# Altium PCB PCB.PcbDoc (part 1 of 2)
Units mm, origin at the board's own origin, x right, y up, seen from the top; angles counter-clockwise.
Board outline 86.23 x 63.63 mm, 4 copper layers (Top Layer, GND top, GND bottom, Bottom Layer), stack 0.603 mm thick; 101 components, 79 nets, 364 pads, 164 vias.
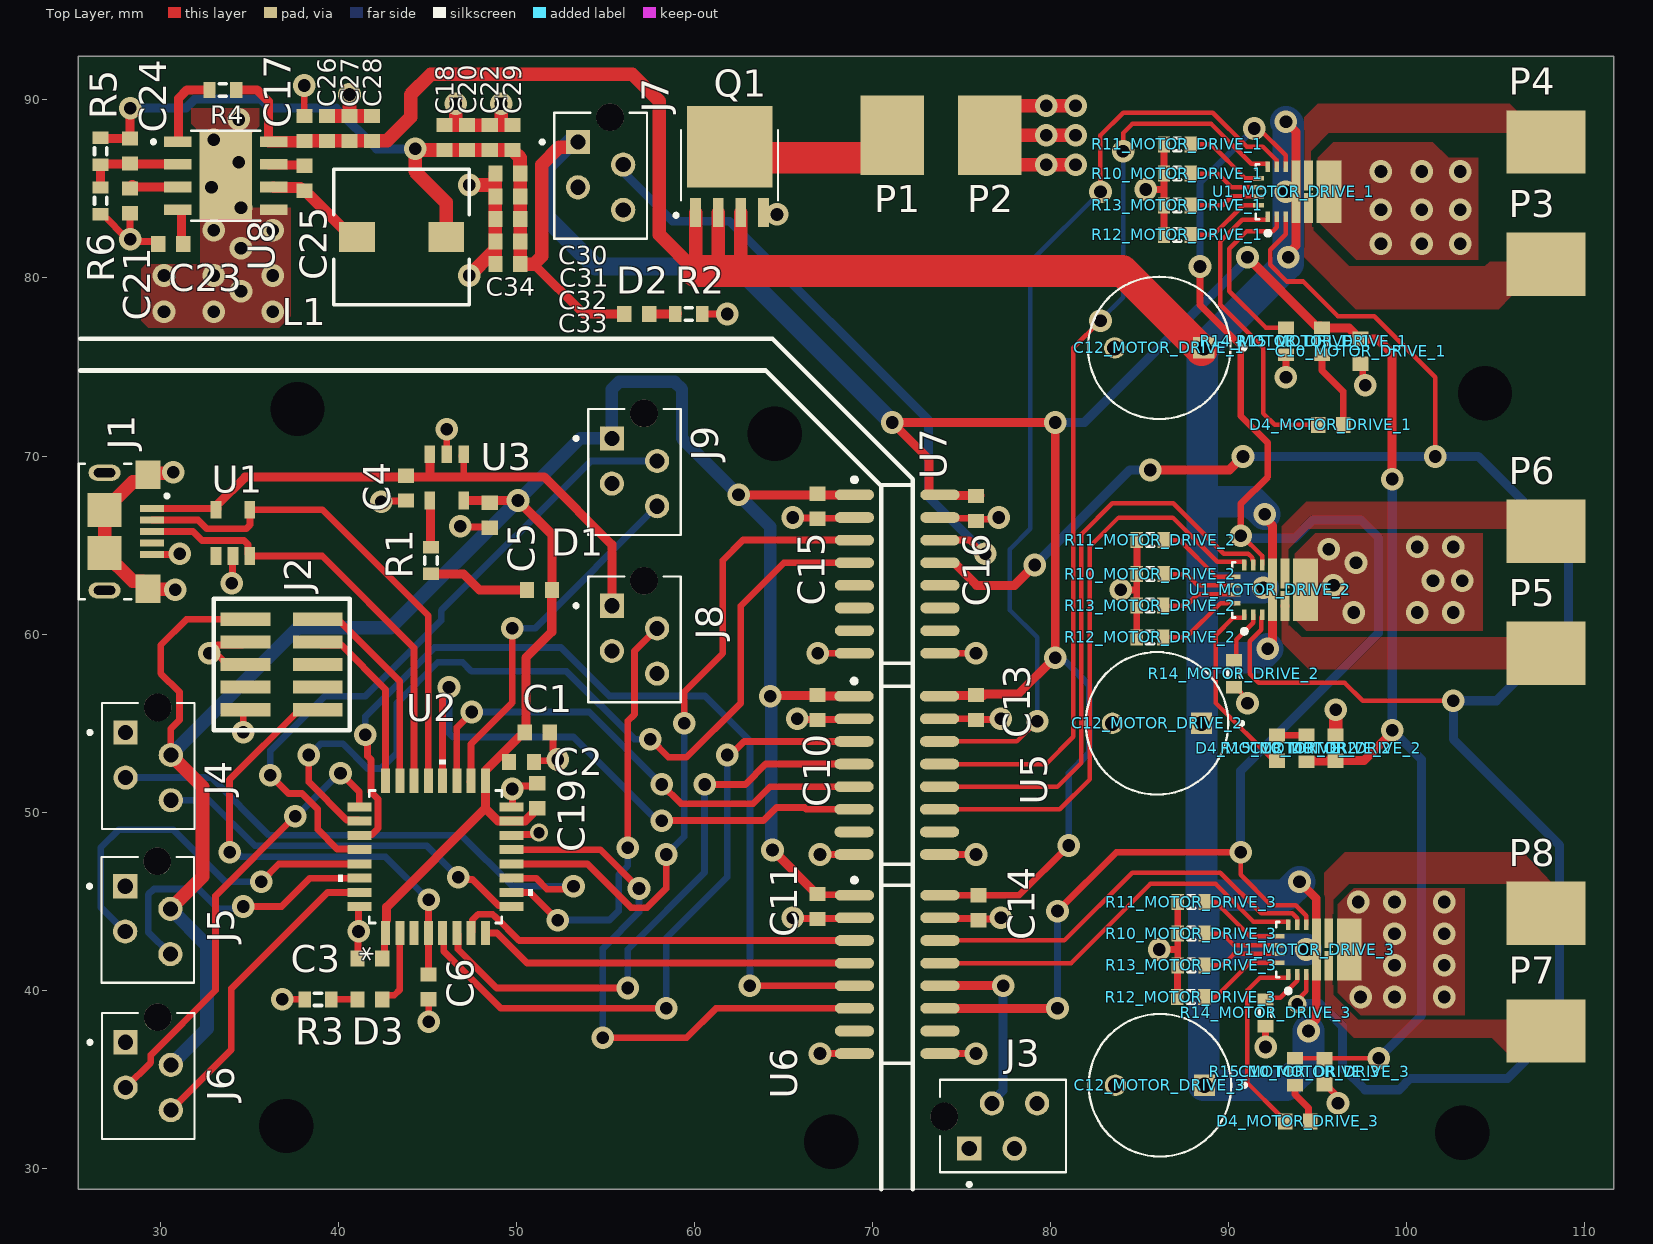
[diagram p0: Top Layer view]
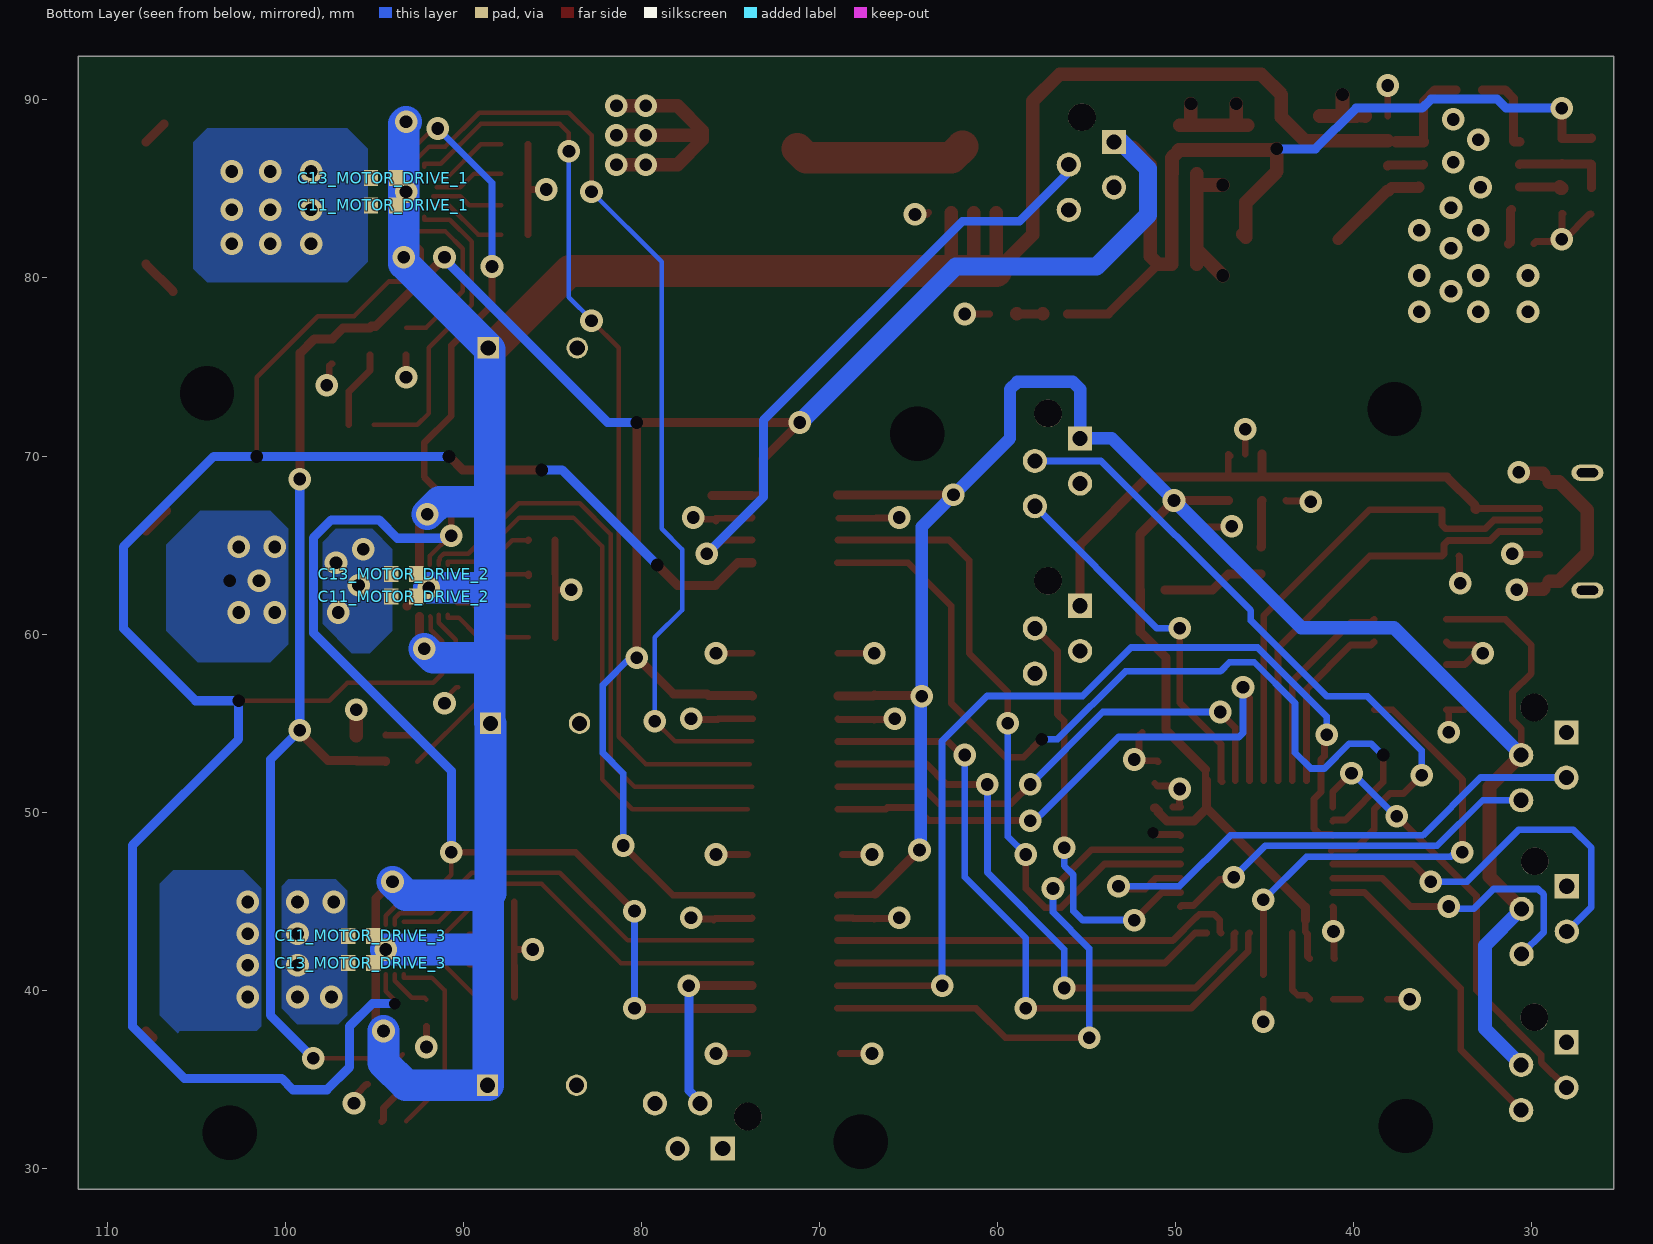
[diagram p1: Bottom Layer view, seen from below]
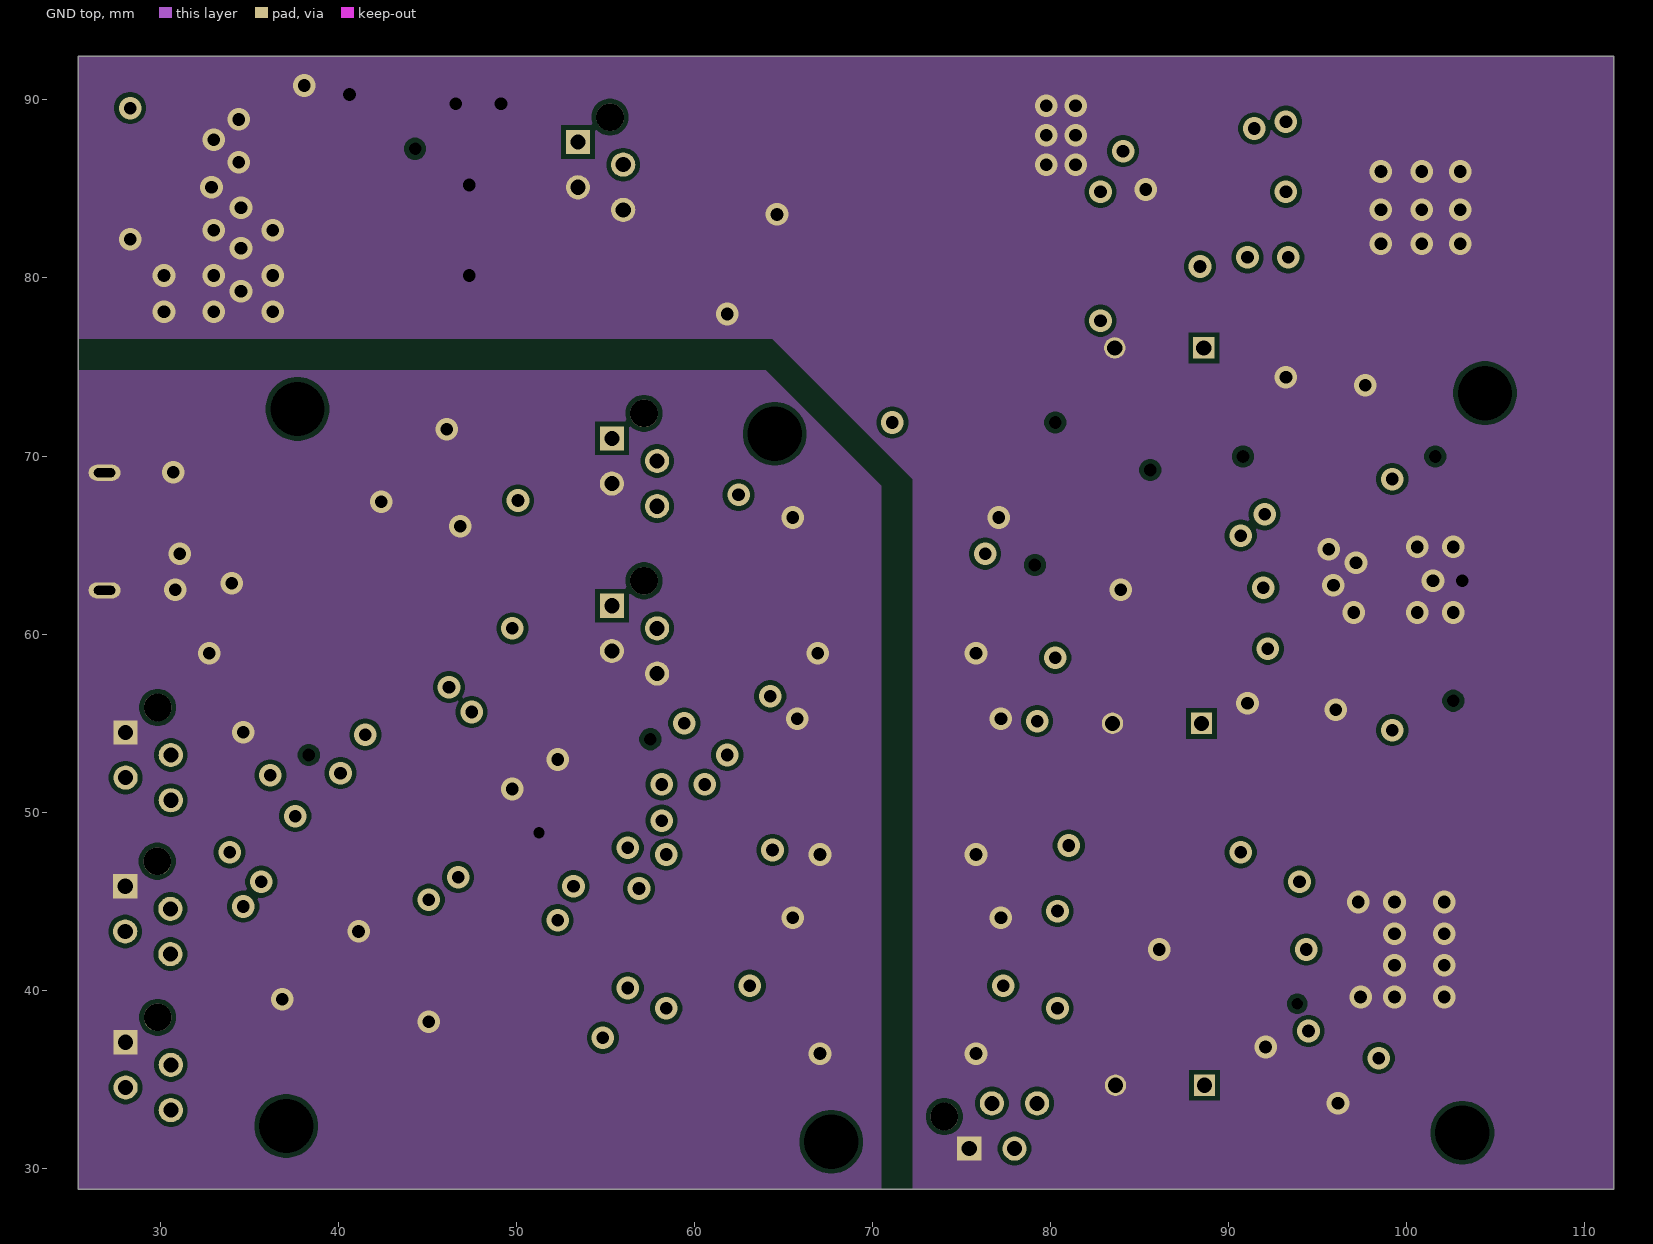
[diagram p2: GND top]
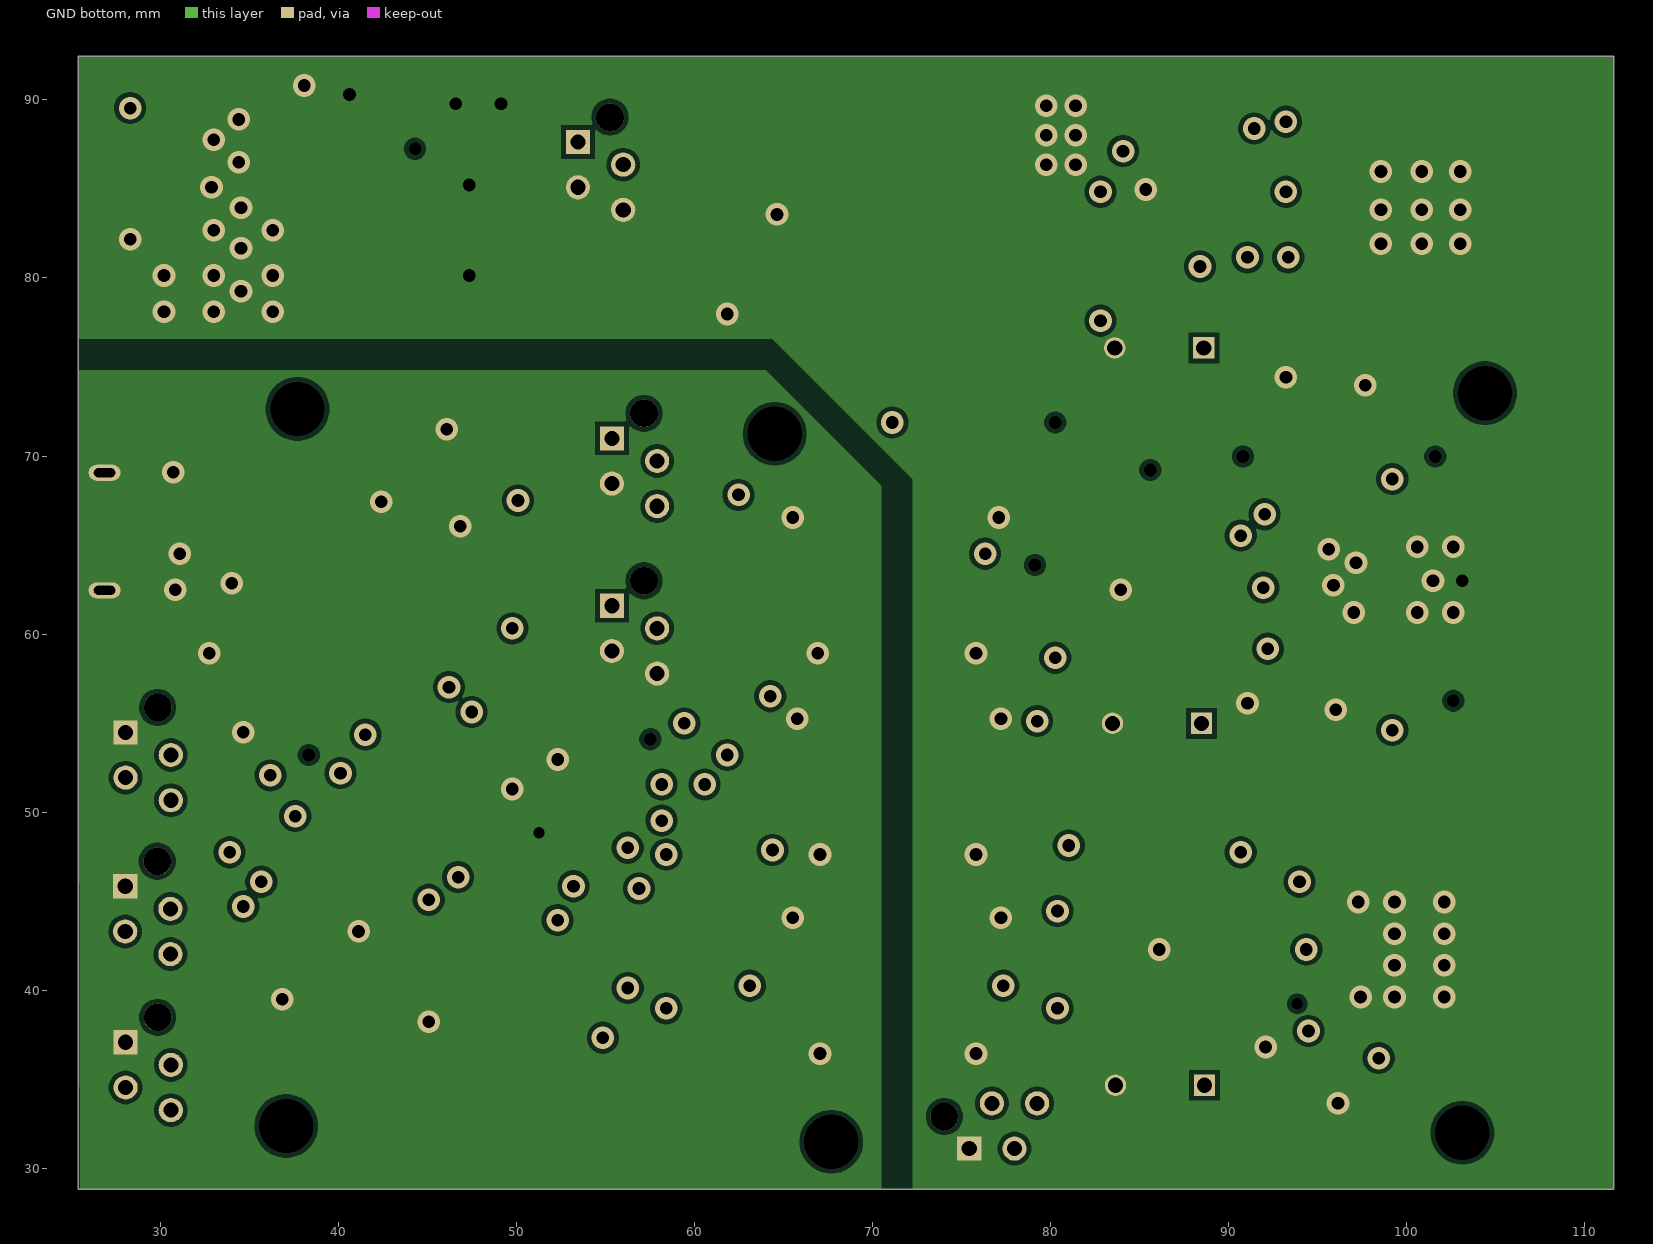
[diagram p3: GND bottom]

## Layer stack, top to bottom
Top Solder: solder mask 0.0102, Solder Resist, Dk 3.5
Top Layer: signal copper 0.035
Dielectric 2: prepreg 0.0711, PP-006, Dk 4.1
GND top: signal copper 0.0356
Dielectric 1: dielectric 0.32, FR-4, Dk 4.8
GND bottom: signal copper 0.0356
Dielectric 3: prepreg 0.0711, PP-006, Dk 4.1
Bottom Layer: signal copper 0.035
Bottom Solder: solder mask 0.0102, Solder Resist, Dk 3.5

## Board outline
25.4,28.829 25.4,92.456 111.633,92.456 111.633,28.829

## Design rules (kind name [scope] priority, off if disabled: settings)
Clearance [All] p1: gap=0.254 ignorepadtopadclearanceinfootprint=TRUE except(0: Arc-Hole Track-Hole SMDPad-Hole THPad-Hole Via-Hole Fill-Hole Poly-Hole Region-Hole Text-Hole; 0.178: Arc-SMDPad Track-SMDPad; 0.203: Arc-Arc Arc-Track Track-Track)
HoleSize [All] p1: absolutevalues=TRUE maxlimit=6.3 minlimit=0.2 maxpercent=80.000 minpercent=20.000
PolygonConnect [All] p1: connectstyle=Direct reliefconductorwidth=0.254 reliefentries=4 polygonreliefangle="90 Angle" airgapwidth=0.254
RoutingVias [All] p1: holewidth=0.711 width=1.27 viastyle="Through Hole" minholewidth=0.711 minwidth=1.27 maxholewidth=0.711 maxwidth=1.27
SolderMaskExpansion SolderMaskExpansionVia [IsVia] p1: expansion=0.102 istentingtop=TRUE
SolderMaskExpansion [All] p2: expansion=0.102 istentingtop=FALSE
Width [All] p1: maxlimit=1.778 minlimit=0.254 preferedwidth=0.381 midlayer1_maxwidth=0.254 midlayer1_prefwidth=0.254 midlayer2_maxwidth=0.254 midlayer2_prefwidth=0.254 minimp=50.000000 maximp=50.000000 favimp=50.000000
29 further rules are at their usual default settings.

## Classes and differential pairs
channel class motor_DRV: MOTOR_DRIVE_1 MOTOR_DRIVE_2 MOTOR_DRIVE_3
component class motor_MCU: C1 C2 C3 C4 C5 C6 C10 C11 C13 C14 C15 C16 C17 C18 C19 C20 C21 C22 C23 C24 C25 C26 C27 C28 C29 C30 C31 C32 C33 C34 D1 D2 D3 J1 J2 J3 J4 J5 J6 J7 J8 J9 L1 P1 P2 P3 P4 P5 P6 P7 P8 Q1 R1 R2 R3 R4 R5 R6 U1 U2 U3 U5 U6 U7 U8
component class MOTOR_DRIVE_3: C10_MOTOR_DRIVE_3 C11_MOTOR_DRIVE_3 C12_MOTOR_DRIVE_3 C13_MOTOR_DRIVE_3 D4_MOTOR_DRIVE_3 R10_MOTOR_DRIVE_3 R11_MOTOR_DRIVE_3 R12_MOTOR_DRIVE_3 R13_MOTOR_DRIVE_3 R14_MOTOR_DRIVE_3 R15_MOTOR_DRIVE_3 U1_MOTOR_DRIVE_3
component class MOTOR_DRIVE_2: C10_MOTOR_DRIVE_2 C11_MOTOR_DRIVE_2 C12_MOTOR_DRIVE_2 C13_MOTOR_DRIVE_2 D4_MOTOR_DRIVE_2 R10_MOTOR_DRIVE_2 R11_MOTOR_DRIVE_2 R12_MOTOR_DRIVE_2 R13_MOTOR_DRIVE_2 R14_MOTOR_DRIVE_2 R15_MOTOR_DRIVE_2 U1_MOTOR_DRIVE_2
component class MOTOR_DRIVE_1: C10_MOTOR_DRIVE_1 C11_MOTOR_DRIVE_1 C12_MOTOR_DRIVE_1 C13_MOTOR_DRIVE_1 D4_MOTOR_DRIVE_1 R10_MOTOR_DRIVE_1 R11_MOTOR_DRIVE_1 R12_MOTOR_DRIVE_1 R13_MOTOR_DRIVE_1 R14_MOTOR_DRIVE_1 R15_MOTOR_DRIVE_1 U1_MOTOR_DRIVE_1

## Components (designator, comment, footprint, x,y, rotation, side; value= is the part's Value field where it differs from the comment)
C1 "Cap Semi" 1608[0603] 51.181,54.483 r180 top value=4.7uF
C2 "Cap Semi" 1608[0603] 50.292,52.832 r180 top value=100nF
C3 "Cap Semi" 1608[0603] 41.783,41.783 r0 top value=100nF
C4 "Cap Semi" 1608[0603] 43.815,68.199 r90 top value=4.7uF
C5 "Cap Semi" 1608[0603] 48.514,66.675 r90 top value=4.7uF
C6 "Cap Semi" 1608[0603] 45.085,40.194 r90 top value=100nF
C10 "Cap Semi" 1608[0603] 66.929,55.88 r90 top value=100nF
C10_MOTOR_DRIVE_1 "Cap Semi" 1608[0603] 97.409,75.881 r90 top value=100nF (schematic designator C10)
C10_MOTOR_DRIVE_2 "Cap Semi" 1608[0603] 96.012,53.594 r270 top value=100nF (schematic designator C10)
C10_MOTOR_DRIVE_3 "Cap Semi" 1608[0603] 95.377,35.433 r90 top value=100nF (schematic designator C10)
C11 "Cap Semi" 1608[0603] 66.929,44.704 r90 top value=100nF
C11_MOTOR_DRIVE_1 "Cap Semi" 1608[0603] 94.488,84.074 r180 bottom value=4.7uf (schematic designator C11)
C11_MOTOR_DRIVE_2 "Cap Semi" 1608[0603] 93.345,62.103 r180 bottom value=4.7uf (schematic designator C11)
C11_MOTOR_DRIVE_3 "Cap Semi" 1608[0603] 95.758,43.053 r180 bottom value=4.7uf (schematic designator C11)
C12_MOTOR_DRIVE_1 "470u" CAPPRD500W60D800H1500 86.106,76.073 r180 top (schematic designator C12)
C12_MOTOR_DRIVE_2 "470u" CAPPRD500W60D800H1500 85.979,54.991 r180 top (schematic designator C12)
C12_MOTOR_DRIVE_3 "470u" CAPPRD500W60D800H1500 86.146,34.671 r180 top (schematic designator C12)
C13 "Cap Semi" 1608[0603] 75.819,55.88 r90 top value=100nF
C13_MOTOR_DRIVE_1 "Cap Semi" 1608[0603] 94.488,85.598 r180 bottom value=100nF (schematic designator C13)
C13_MOTOR_DRIVE_2 "Cap Semi" 1608[0603] 93.345,63.373 r180 bottom value=100nF (schematic designator C13)
C13_MOTOR_DRIVE_3 "Cap Semi" 1608[0603] 95.758,41.529 r180 bottom value=100nF (schematic designator C13)
C14 "Cap Semi" 1608[0603] 75.946,44.639 r90 top value=100nF
C15 "Cap Semi" 1608[0603] 66.929,67.183 r90 top value=100nF
C16 "Cap Semi" 1608[0603] 75.819,67.056 r90 top value=100nF
C17 "Cap Semi" 1608[0603] 38.1,88.392 r270 top value=4.7uF
C18 "Cap Semi" 1608[0603] 45.974,87.884 r270 top value=4.7uF
C19 "Cap Semi" 1608[0603] 51.181,50.927 r270 top value=100nF
C20 "Cap Semi" 1608[0603] 47.244,87.884 r270 top value=4.7uF
C21 "Cap Semi" 1608[0603] 28.321,84.328 r90 top value=1uF
C22 "Cap Semi" 1608[0603] 48.514,87.884 r270 top value=4.7uF
C23 "Cap Semi" 1608[0603] 30.607,81.915 r180 top value=3.3nF
C24 "Cap Semi" 1608[0603] 28.321,87.122 r90 top value=12pF
C25 "Cap Semi" 1608[0603] 38.1,85.598 r90 top value=100nF
C26 "Cap Semi" 1608[0603] 39.37,88.392 r270 top value=4.7uF
C27 "Cap Semi" 1608[0603] 40.64,88.392 r270 top value=4.7uF
C28 "Cap Semi" 1608[0603] 41.91,88.392 r270 top value=4.7uF
C29 "Cap Semi" 1608[0603] 49.784,87.884 r270 top value=4.7uF
C30 "Cap Semi" 1608[0603] 49.53,85.852 r0 top value=4.7uF
C31 "Cap Semi" 1608[0603] 49.53,84.582 r0 top value=4.7uF
C32 "Cap Semi" 1608[0603] 49.53,83.312 r0 top value=4.7uF
C33 "Cap Semi" 1608[0603] 49.53,82.042 r0 top value=4.7uF
C34 "Cap Semi" 1608[0603] 49.53,80.772 r0 top value=4.7uF
D1 "3V3_GOOD" 1608[0603] 51.308,62.484 r180 top
D2 "B5V_GOOD" 1608[0603] 56.769,77.978 r0 top
D3 "LED" 1608[0603] 41.783,39.497 r180 top
D4_MOTOR_DRIVE_1 "LED2" 1608[0603] 95.73,71.755 r180 top (schematic designator D4)
D4_MOTOR_DRIVE_2 "LED2" 1608[0603] 92.71,53.594 r270 top (schematic designator D4)
D4_MOTOR_DRIVE_3 "LED2" 1608[0603] 93.881,32.639 r180 top (schematic designator D4)
J1 "10118193-0001LF" FCI_10118193-0001LF 26.887,65.761 r270 top
J2 "FTSH-105-01-XXX-DV-K" FTSH-105-01-XXX-DV-K 36.83,58.293 r270 top
J3 "7-215079-4" TE_7-215079-4 75.438,31.115 r180 top
J4 "7-215079-4" TE_7-215079-4 28.067,54.483 r90 top
J5 "7-215079-4" TE_7-215079-4 28.045,45.844 r90 top
J6 "7-215079-4" TE_7-215079-4 28.067,37.084 r90 top
J7 "7-215079-4" TE_7-215079-4 53.467,87.63 r90 top
J8 "7-215079-4" TE_7-215079-4 55.372,61.595 r90 top
J9 "7-215079-4" TE_7-215079-4 55.372,70.993 r90 top
L1 "Inductor" WE-PD-M-PB 43.561,82.296 r0 top value=4.7uH
P1 "BAT+" PCBComponent_1 71.12,88.011 r90 top
P2 "BAT-" PCBComponent_1 76.581,88.011 r90 top
P3 "M1+" PCBComponent_1 107.823,80.772 r180 top
P4 "M1-" PCBComponent_1 107.823,87.63 r180 top
P5 "M2+" PCBComponent_1 107.823,58.928 r180 top
P6 "M2-" PCBComponent_1 107.823,65.786 r180 top
P7 "M3+" PCBComponent_1 107.823,37.719 r180 top
P8 "M3-" PCBComponent_1 107.823,44.323 r180 top
Q1 "BUK6Y10-30P" TO127P600X120-5N 61.976,86.316 r0 top
R1 "Res2" J1-0603 45.212,64.135 r270 top value=1K
R2 "Res2" J1-0603 59.69,77.978 r180 top value=13K
R3 "Res2" J1-0603 38.874,39.497 r0 top value=1K
R4 "Res2" J1-0603 33.528,90.551 r0 top value=10K
R5 "Res2" J1-0603 26.67,87.11 r270 top value=133K
R6 "Res2" J1-0603 26.67,84.328 r270 top value=24K
R10_MOTOR_DRIVE_1 "Rsr" J1-0603 87.122,85.852 r180 top value=0 (schematic designator R10)
R10_MOTOR_DRIVE_2 "Rsr" J1-0603 85.598,63.373 r180 top value=0 (schematic designator R10)
R10_MOTOR_DRIVE_3 "Rsr" J1-0603 87.896,43.18 r180 top value=0 (schematic designator R10)
R11_MOTOR_DRIVE_1 "Rdiag" J1-0603 87.122,87.503 r180 top value=0 (schematic designator R11)
R11_MOTOR_DRIVE_2 "Rdiag" J1-0603 85.598,65.278 r180 top value=0 (schematic designator R11)
R11_MOTOR_DRIVE_3 "Rdiag" J1-0603 87.896,44.958 r180 top value=0 (schematic designator R11)
R12_MOTOR_DRIVE_1 "Rmode" J1-0603 87.122,82.423 r180 top value=0 (schematic designator R12)
R12_MOTOR_DRIVE_2 "Rmode" J1-0603 85.586,59.817 r180 top value=0 (schematic designator R12)
R12_MOTOR_DRIVE_3 "Rmode" J1-0603 87.872,39.624 r180 top value=0 (schematic designator R12)
R13_MOTOR_DRIVE_1 "Rtrip" J1-0603 87.122,84.074 r180 top value=0 (schematic designator R13)
R13_MOTOR_DRIVE_2 "Rtrip" J1-0603 85.586,61.595 r180 top value=0 (schematic designator R13)
R13_MOTOR_DRIVE_3 "Rtrip" J1-0603 87.896,41.402 r180 top value=0 (schematic designator R13)
R14_MOTOR_DRIVE_1 "R|PROP|" J1-0603 93.218,76.442 r270 top value=2K2 (schematic designator R14)
R14_MOTOR_DRIVE_2 "R|PROP|" J1-0603 90.297,57.773 r270 top value=2K2 (schematic designator R14)
R14_MOTOR_DRIVE_3 "R|PROP|" J1-0603 92.075,38.735 r270 top value=2K2 (schematic designator R14)
R15_MOTOR_DRIVE_1 "Rled" J1-0603 95.25,76.442 r90 top value=4K7 (schematic designator R15)
R15_MOTOR_DRIVE_2 "Rled" J1-0603 94.361,53.594 r270 top value=4K7 (schematic designator R15)
R15_MOTOR_DRIVE_3 "Rled" J1-0603 93.726,35.433 r90 top value=4K7 (schematic designator R15)
U1 "CM1223" SOT23-5 34.097,64.389 r0 top
U1_MOTOR_DRIVE_1 "PDRV8243HRXYQ1" RXY0014A-MFG 93.831,84.836 r90 top (schematic designator U1)
U1_MOTOR_DRIVE_2 "PDRV8243HRXYQ1" RXY0014A-MFG 92.506,62.484 r90 top (schematic designator U1)
U1_MOTOR_DRIVE_3 "PDRV8243HRXYQ1" RXY0014A-MFG 94.974,42.291 r90 top (schematic designator U1)
U2 "STM32G441KBT3" LQFP32_7X7_STM 45.466,47.498 r90 top
U3 "NCP164C" SOT23-5 46.101,70.104 r180 top
U5 "MAX14930" SOIC16_N 71.374,52.07 r0 top
U6 "MAX14930" SOIC16_N 71.387,40.894 r0 top
U7 "MAX14930" SOIC16_N 71.387,63.373 r0 top
U8 "TPS54227DDA" VREG_LM5017MR/NOPB 33.696,85.74 r0 top

## Footprints (in the part's own frame and the unit in brackets; to place one, negate y for a bottom-side part, rotate by r counter-clockwise, add the part's x,y. Pads: shape width x height; smd on the part's side, far side on the other; paste and mask are expansions set on the pad)
1608[0603] [mm] "Chip Capacitor, Body 1.6x0.8mm, IPC High Density"
  rect 0.8x0.9 smd: 1(-0.7,0) 2(0.7,0)
  body extent -0.87,-0.48 0.87,0.48, height 1.3
CAPPRD500W60D800H1500 [mm]
  round 1.2 hole 0.85: N(2.5,0)
  rect 1.2x1.2 hole 0.85: P(-2.5,0)
  silkscreen extent -4.85,-4 4,4, body extent -4,-4 4,4, height 15
FCI_10118193-0001LF [mm]
  rect 0.4x1.35 smd: 1(-1.3,2.675) 2(-0.65,2.675) 3(0,2.675) 4(0.65,2.675) 5(1.3,2.675)
  rect 1.6x1.4 smd: S1(-3.2,2.45) S2(3.2,2.45)
  rect 1.9x1.9 smd: S3(1.2,0) S4(-1.2,0)
  oval 0.9x1.8 hole 0.5 slot 1.2 at 90 deg: S5(-3.3,0) S6(3.3,0)
  silkscreen extent -3.8,-1.45 3.8,3.6
FTSH-105-01-XXX-DV-K [mil]
  rect 29x110 smd mask+2: 1(-100,-80) 2(-100,80) 3(-50,-80) 4(-50,80) 5(0,-80) 6(0,80) 7(50,-80) 8(50,80) 9(100,-80) 10(100,80)
  silkscreen extent -145,-150 145,150
J1-0603 [mm] "Chip Resistor, Body 1.6x0.8mm, IPC High Density"
  rect 0.7x0.9 smd: 1(-0.75,0) 2(0.75,0)
  silkscreen extent -0.2,-0.35 0.2,0.35, body extent -0.85,-0.48 0.85,0.48, height 0.9
LQFP32_7X7_STM [mm]
  rect 1.359x0.501 smd paste+0 mask+0: 1(-4.274,2.8) 2(-4.274,2) 3(-4.274,1.2) 4(-4.274,0.4) 5(-4.274,-0.4) 6(-4.274,-1.2) 7(-4.274,-2) 8(-4.274,-2.8) 17(4.274,-2.8) 18(4.274,-2) 19(4.274,-1.2) 20(4.274,-0.4) 21(4.274,0.4) 22(4.274,1.2) 23(4.274,2) 24(4.274,2.8)
  rect 0.501x1.359 smd paste+0 mask+0: 9(-2.8,-4.274) 10(-2,-4.274) 11(-1.2,-4.274) 12(-0.4,-4.274) 13(0.4,-4.274) 14(1.2,-4.274) 15(2,-4.274) 16(2.8,-4.274) 25(2.8,4.274) 26(2,4.274) 27(1.2,4.274) 28(0.4,4.274) 29(-0.4,4.274) 30(-1.2,4.274) 31(-2,4.274) 32(-2.8,4.274)
  silkscreen extent -3.72,-5.46 5.46,5.46, body extent 0,0 0.25,0.25, height 0.25
PCBComponent_1 [mil]
  rect 175x140 smd: 1(0,0)
RXY0014A-MFG [mm]
  rect 0.6x0.25 smd paste+0 mask+0.051: 1(-1.4,1.625) 2(-1.4,1.125) 3(-1.4,0.625) 8(1.4,0.625) 9(1.4,1.125) 10(1.4,1.625)
  rect 3.5x0.5 smd paste-1.737 mask-1.74: 4(0,0.05)
  rect 1.675x0.5 smd paste-0.825 mask-0.826: 5(-0.913,-0.65) 7(0.913,-0.65)
  rect 3.5x1.4 smd paste-1.737 mask-1.74: 6(0,-1.8)
  rect 0.25x0.6 smd paste+0 mask+0.051: 11(0.75,2.15) 12(0.25,2.15) 13(-0.25,2.15) 14(-0.75,2.15)
  silkscreen extent -2.45,1.5 1.55,2.3, body extent 0,0 0.25,0.25, height 0.25
SOIC16_N [mm] "SOIC, 16-Leads, Body 9.9x3.9mm, Pitch 1.27mm, IPC Medium Density"
  oval 2.2x0.6 smd: 1(-2.4,4.445) 2(-2.4,3.175) 3(-2.4,1.905) 4(-2.4,0.635) 5(-2.4,-0.635) 6(-2.4,-1.905) 7(-2.4,-3.175) 8(-2.4,-4.445) 9(2.4,-4.445) 10(2.4,-3.175) 11(2.4,-1.905) 12(2.4,-0.635) 13(2.4,0.635) 14(2.4,1.905) 15(2.4,3.175) 16(2.4,4.445)
  silkscreen extent -2.52,-5 0.9,5.42, body extent -2,-5 2,5, height 1.91
SOT23-5 [mm] "SOT143-4 as used in SP0503BAHTG"
  round 0.4 on Top Overlay: 1(-1.7,0)
  rect 0.6x1 smd: 1(-0.95,0) 2(0,0) 3(0.95,0) 4(0.95,2.6) 5(-0.95,2.6)
  body extent -1.46,0.13 1.46,2.47, height 1
TE_7-215079-4 [mm]
  rect 1.358x1.358 hole 0.85: 1(0,0)
  round 1.358 hole 0.85: 2(-1.27,-2.54) 3(-2.54,0) 4(-3.81,-2.54)
  round 1.55 hole 1.55 unplated: ""(1.4,-1.8)
  silkscreen extent -5.43,-3.87 1.65,2.11
TO127P600X120-5N [mm]
  rect 0.6x1.62 smd: 1(-1.905,-2.65) 2(-0.635,-2.65) 3(0.635,-2.65) 4(1.905,-2.65)
  rect 4.8x4.58 smd paste-3: 5(0,1.06)
  silkscreen extent -3.1,-2.9 2.72,1.97
VREG_LM5017MR/NOPB [mm]
  rrect5% 1.55x0.6 smd mask+0: 1(-2.7,1.905) 2(-2.7,0.635) 3(-2.7,-0.635) 4(-2.7,-1.905) 5(2.7,-1.905) 6(2.7,-0.635) 7(2.7,0.635) 8(2.7,1.905)
  rect 2.95x4.9 smd paste-3 mask+0: 9(0,0)
  silkscreen extent -4.17,-2.52 1.95,2.52
WE-PD-M-PB [mm] "SMD Inductor, 2-Leads, Body 7.3 x 7.3 mm"
  rect 2x1.7 smd: 1(-2.5,0) 2(2.5,0)
  silkscreen extent -3.8,-3.8 3.8,3.8, body extent -3.65,-3.65 3.65,3.65, height 4.09

## Part data
C1 C2 C3 C4 C5 C6 C10 C10_MOTOR_DRIVE_1 C10_MOTOR_DRIVE_2 C10_MOTOR_DRIVE_3 C11 C11_MOTOR_DRIVE_1 C11_MOTOR_DRIVE_2 C11_MOTOR_DRIVE_3 C13 C13_MOTOR_DRIVE_1 C13_MOTOR_DRIVE_2 C13_MOTOR_DRIVE_3 C14 C15 C16 C17 C18 C19 C20 C21 C22 C23 C24 C25 C26 C27 C28 C29 C30 C31 C32 C33 C34: "Capacitor (Semiconductor SIM Model)", LatestRevisionDate=29-May-2009, LatestRevisionNote="IPC-7351 Footprint Added.", PackageDescription="Chip Capacitor", PackageReference=C1206, Published=8-Jun-2000, Publisher="Altium Limited"
C12_MOTOR_DRIVE_1 C12_MOTOR_DRIVE_2 C12_MOTOR_DRIVE_3: library part EEUFR1E471YB, "470F 25V Aluminum Electrolytic Capacitors Radial, Can 8000 Hrs @ 105C", Package="RADIAL-2 Panasonic", Availability="In Stock", Check_prices=https://www.snapeda.com/parts/EEUFR1E471YB/Panasonic/view-part/5797024/?ref=eda, MF=Panasonic, MP=EEUFR1E471YB, Price=None, SnapEDA_Link=https://www.snapeda.com/parts/EEUFR1E471YB/Panasonic/view-part/5797024/?ref=snap
D1 D2 D3: library part LED2, "Typical RED, GREEN, YELLOW, AMBER GaAs LED", LatestRevisionDate=17-Jul-2002, LatestRevisionNote="Re-released for DXP Platform.", PackageDescription="SM LED; 2 Flat Leads", PackageReference=3.2X1.6X1.1, PackageVersion=Feb-2002, Published=8-Jun-2000, Publisher="Altium Limited"
D4_MOTOR_DRIVE_1 D4_MOTOR_DRIVE_2 D4_MOTOR_DRIVE_3: "Typical RED, GREEN, YELLOW, AMBER GaAs LED", LatestRevisionDate=17-Jul-2002, LatestRevisionNote="Re-released for DXP Platform.", PackageDescription="SM LED; 2 Flat Leads", PackageReference=3.2X1.6X1.1, PackageVersion=Feb-2002, Published=8-Jun-2000, Publisher="Altium Limited"
J1: "USB - micro B USB 2.0 Receptacle Connector 5 Position Surface Mount, Right Angle; Through Hole", Package=None, Availability=Unavailable, MF="Amphenol ICC", MP=10118193-0001LF, Price=None, SnapEDA_Link=https://www.snapeda.com/parts/10118193-0001LF/Amphenol%20FCI/view-part/2758989/?ref=snap
J2: "TERMINAL STRIP, .050\"(1.27mm) PITCH, 10 PINS, KEYED", MANUFACTURER=SAMTEC, CREATED="November 30, 2016 - Wendy Xin", PCB DECAL=FTSH-105-01-XXX-DV-K
J3 J4 J5 J6 J7 J8 J9: "Micro-MaTch 4 Position 1.27 mm Pitch Vertical Female-on-Board Connector", Package=SMD-6, Availability=Unavailable, MF="TE Connectivity", MP=7-215079-4, Price=None, SnapEDA_Link=https://www.snapeda.com/parts/7-215079-4/TE%20Connectivity%20AMP%20Connectors/view-part/453401/?ref=snap
P1 P2 P3 P4 P5 P6 P7 P8: library part Component_1
Q1: library part MOSFET-P, "P-Channel MOSFET", LatestRevisionDate=17-Jul-2002, LatestRevisionNote="Re-released for DXP Platform.", PackageDescription="TO, Flat Index; 3 In-Line, Axial Leads; Body Dia. 4.6mm; Lead Dia. 0.5 mm (max)", PackageReference=E3, PackageVersion=1995/1996, Published=8-Jun-2000, Publisher="Altium Limited"
R1 R2 R3 R4 R5 R6: "Resistor", LatestRevisionDate=17-Jul-2002, LatestRevisionNote="Re-released for DXP Platform.", PackageDescription="Axial Device, Thru-Hole; 2 Leads; 0.4 in Pin Spacing", PackageReference=AXIAL-0.4, Published=8-Jun-2000, Publisher="Altium Limited"
R10_MOTOR_DRIVE_1 R10_MOTOR_DRIVE_2 R10_MOTOR_DRIVE_3 R11_MOTOR_DRIVE_1 R11_MOTOR_DRIVE_2 R11_MOTOR_DRIVE_3 R12_MOTOR_DRIVE_1 R12_MOTOR_DRIVE_2 R12_MOTOR_DRIVE_3 R13_MOTOR_DRIVE_1 R13_MOTOR_DRIVE_2 R13_MOTOR_DRIVE_3 R14_MOTOR_DRIVE_1 R14_MOTOR_DRIVE_2 R14_MOTOR_DRIVE_3 R15_MOTOR_DRIVE_1 R15_MOTOR_DRIVE_2 R15_MOTOR_DRIVE_3: library part Res3, "Resistor", LatestRevisionDate=29-May-2009, LatestRevisionNote="IPC-7351 Footprint Added.", PackageDescription="Chip Resistor", PackageReference=J1-0603, Published=8-Jun-2000, Publisher="Altium Limited"
U1_MOTOR_DRIVE_1 U1_MOTOR_DRIVE_2 U1_MOTOR_DRIVE_3: "No Description Available", Mfr_Name="Texas Instruments", Copyright="Copyright (C) 2021 Ultra Librarian. All rights reserved.", Manufacturer_Part_Number=PDRV8243HRXYQ1, RefDes=RefDes, Type=DEV
U2: "No Description Available", Built_By=EMA_Cory, Copyright="Copyright (C) 2018 Accelerated Designs. All rights reserved", Datasheet=https://www.st.com/resource/en/datasheet/stm32g441kb.pdf, Manufacturer_Part_Number=STM32G441KBT3, RefDes=RefDes, SourceLibrary=Add_to_database_2020-11-05, Type=DEV, Vendor=STMicroelectronics
U8: Package=None, Availability=Unavailable, MP=TPS54227DDA, Price=None
L1: Code_IEC=1005, Code_JEITA=0402, LatestRevisionDate=29-May-2009, LatestRevisionNote="IPC-7351 Footprint Added.", PackageDescription="Chip Inductor", PackageReference=0402-A, Published=8-Jun-2000, Publisher="Altium Limited"

## Free pads (board coordinates)
  round 1.524 hole 3.048: HOLE(37.084,32.385) HOLE(37.719,72.644) HOLE(64.516,71.247) HOLE(67.691,31.496) HOLE(103.124,32.004) HOLE(104.394,73.533)

## Via types
v1: diameter 1.27/1.27/1.27/1.27 (per signal layer), hole 0.711, Top Layer to Bottom Layer, tented both sides, 147 vias
v2: diameter 1.27/0.381/0.381/0.381 (per signal layer), hole 0.711, Top Layer to Bottom Layer, tented both sides, 15 vias
v3: diameter 1.016/0.381/0.381/0.381 (per signal layer), hole 0.635, Top Layer to Bottom Layer, tented both sides, 2 vias

## Nets (pads, with @x,y where several pads share a name; then routed paths per layer and width w, separated by ;. In a path a pad name is that pad's centre, name@x,y a point inside that pad or via, vN(x,y) a via of type N, cw(c..) or ccw(c..) an arc to the next point about the centre after c; other vN are vias at no path point)
+3V3: C1.2 C2.2 C3.2 C5.2 C10.2 C11.2 C15.2 C19.2 D1.1 J2.1 J4.2 J5.2 J6.2 J9.1 U2.1 U2.15 U2.17 U3.5 U5.1 U6.1 U7.1 | length 153.9
  Top Layer w0.381: J4.2 30.607,54.693 31.086,55.173 31.086,56.748 30.035,57.799 30.035,59.375 31.493,60.833 J2.1 ; C3.2 42.606,41.906 42.606,43.165 U2.1 42.726,43.284 42.726,43.955 ; U2.17 48.326,51.831 U2.17@48.326,52.391 ; C1.2 C1.2@50.484,54.486 ; C1.2@50.543,54.608 C1.2@50.543,54.74 ; C11.2@66.879,45.404 66.911,45.372 68.954,45.372 U6.1
  Top Layer w0.508: 42.726,43.955 42.726,44.673 48.266,50.213 ; U3.5 v1(50.098,67.504) 52.008,65.594 D1.1 ; U2.17 48.266,50.213 ; U2.17@48.326,52.391 C1.2@50.543,54.608 ; C1.2@50.543,54.74 50.543,56.642 ; 50.546,56.645 50.546,58.674 51.995,60.123 D1.1@51.995,62.484 ; C19.2 51.131,50.227 50.985,50.081 50.985,50.003 50.484,49.502 49.743,49.502 U2.15 48.981,49.498 48.266,50.213 ; v1(62.484,67.818) 62.485,67.819 68.986,67.819 U7.1 ; v1(64.262,56.515) 64.295,56.548 66.896,56.548 C10.2 66.994,56.515 U5.1 ; v1(64.389,47.879) 64.404,47.879 C11.2@66.879,45.404
  Top Layer w0.762: J5.2 32.385,46.374 32.385,51.435 J4.2
  Bottom Layer w0.7: v1(50.098,67.504) 53.587,70.993 J9.1 55.372,73.758 55.782,74.168 58.899,74.168 59.309,73.758 59.309,70.993 v1(62.484,67.818) 64.262,66.04 v1(64.262,56.515) 64.325,56.451 64.325,47.942 v1(64.389,47.879)
  Bottom Layer w0.762: J5.2 32.639,42.52 32.639,37.846 J6.2 ; J4.2 37.761,60.367 42.961,60.367 v1(50.098,67.504)
+5V_B: C10_MOTOR_DRIVE_1.2 C10_MOTOR_DRIVE_2.2 C10_MOTOR_DRIVE_3.2 C13.2 C14.2 C16.2 C18.2 C20.2 C22.2 C24.2 C29.2 C30.2 C31.2 C32.2 C33.2 C34.2 D2.1 J7.1 L1.2 R5.1 R15_MOTOR_DRIVE_1.2 R15_MOTOR_DRIVE_2.2 R15_MOTOR_DRIVE_3.2 U5.16 U6.16 U7.16 | length 218.3
  Top Layer w0.254: R15_MOTOR_DRIVE_3.2@93.403,36.406 93.626,36.183 R15_MOTOR_DRIVE_3.2 95.327,36.183 C10_MOTOR_DRIVE_3.2 95.439,36.195 v1(98.425,36.195)
  Top Layer w0.381: U7.16@73.177,67.919 73.279,67.818 U7.16 U7.16@73.818,67.787 ; U6.16 C14.2 78.232,45.339 v1(81.026,48.133) v1@80.949,48.133 ; C16.2@76.042,67.787 C16.2@76.073,67.756
  Top Layer w0.5: 50.989,80.772 53.783,77.978 D2.1 ; U7.16@73.177,67.919 73.177,69.825 v1(71.12,71.882) v2(80.264,71.882) v1(80.264,58.674) 80.234,58.674 78.202,56.642 76.327,56.642 76.242,56.557 73.816,56.557 U5.16 ; U7.16@73.818,67.787 C16.2@76.042,67.787
  Top Layer w0.508: R5.1 26.689,87.841 28.302,87.841 C24.2 v1(28.321,89.535) ; v1(91.059,81.153) 94.924,77.288 95.154,77.288 R15_MOTOR_DRIVE_1.2 96.748,77.192 97.359,76.581 C10_MOTOR_DRIVE_1.2 98.36,76.581 99.168,75.773 99.168,68.726 v1(99.187,68.707) ; R15_MOTOR_DRIVE_2.2 94.386,52.869 95.987,52.869 C10_MOTOR_DRIVE_2.2 97.598,52.894 99.187,54.483 v1(99.187,54.61)
  Top Layer w0.762: L1.2@46.228,82.463 L1.2 46.061,84.241 44.323,85.979 v2(44.323,87.249) 44.388,87.184 C18.2 C20.2 C22.2 C29.2 49.834,87.184 49.853,87.165 49.853,87.115 50.211,86.757 50.211,85.871 C30.2 C31.2 C32.2 C33.2 C34.2 50.989,80.772 51.435,81.218 51.435,86.36 52.407,87.332 53.169,87.332 J7.1
  Bottom Layer w0.381: v1(80.264,58.674) 80.645,58.674 82.169,57.15 82.169,53.333 81.026,52.19 v1(81.026,48.133)
  Bottom Layer w0.508: v1(28.321,89.535) 31.455,89.535 31.963,90.043 35.666,90.043 36.174,89.535 39.878,89.535 42.164,87.249 v2(44.323,87.249) ; v2(80.264,71.882) 81.901,71.882 91.059,81.04 v1(91.059,81.153) ; v1(98.425,36.195) 100.838,38.608 100.838,52.959 v1(99.187,54.61) v1(99.187,68.707)
  Bottom Layer w1: J7.1@53.064,87.627 51.562,86.125 51.562,83.535 54.452,80.645 62.357,80.645 v1(71.12,71.882)
+5V_USB: C4.2 J1.1 J8.1 U1.5 U3.1@47.051,70.104 U3.3 | length 34.5
  Top Layer w0.381: J1.1 29.572,67.051 33.085,67.051 U1.5 ; U3.1@46.942,69.995 47.051,70.104 47.051,68.895 46.99,68.834
  Top Layer w0.508: U1.5 33.193,67.035 33.193,67.235 34.777,68.819 42.545,68.819 42.56,68.834 45.085,68.834 ; U3.3 45.151,68.9 45.085,68.834 ; J8.1 55.372,65.024 51.562,68.834 46.99,68.834 45.085,68.834
DRV_OFF: U2.13 U6.6 | length 32.1
  Top Layer w0.381: U2.13 54.718,47.898 v1(56.896,45.72) ; v1(54.864,37.338) 59.563,37.338 61.214,38.989 U6.6
  Bottom Layer w0.381: v1(54.864,37.338) 54.864,42.355 56.896,44.387 v1(56.896,45.72)
DRV_OFF_MOTOR_DRIVE_1: U1_MOTOR_DRIVE_1.8 U1_MOTOR_DRIVE_2.8 U1_MOTOR_DRIVE_3.8 U6.11 | length 91.4
  Top Layer w0.254: v1(90.678,47.752) 90.678,46.482 92.382,44.778 93.764,44.778 94.349,44.194 U1_MOTOR_DRIVE_3.8 ; v1(90.678,65.53) 90.737,65.53 91.879,64.389 91.879,63.886 U1_MOTOR_DRIVE_2.8 ; v1(91.44,88.392) 91.694,88.392 93.206,86.88 U1_MOTOR_DRIVE_1.8
  Top Layer w0.381: v1(80.391,44.45) 83.693,47.752 v1(90.678,47.752) ; v1(88.392,80.645) 88.392,78.486 90.678,76.2 90.678,72.263 92.202,70.739 92.202,68.834 90.678,67.31 v1(90.678,65.53)
  Top Layer w0.508: U6.11 v1(80.391,38.989)
  Bottom Layer w0.381: v1(80.391,38.989) v1(80.391,44.45) ; v1(88.392,80.645) 88.392,85.344 v1(91.44,88.392)
  Bottom Layer w0.508: v1(90.678,47.752) 90.678,52.324 98.425,60.071 98.425,65.405 97.409,66.421 94.738,66.421 93.701,65.384 90.824,65.384 v1(90.678,65.53) ; v1(91.44,88.392) v1@91.44,88.598
GND: C1.1 C2.1 C3.1 C4.1 C5.1 C6.1 C10.1 C11.1 C15.1 C19.1 J1.5 J1.S1 J1.S2 J1.S3 J1.S4 J1.S5 J1.S6 J2.3 J2.5 J2.9 J4.1 J5.1 J6.1 J8.3 J8.4 J9.3 R3.1 U1.2 U2.14 U2.16 U2.32 U3.2 U5.2 U5.8 U6.2 U6.8 U7.2 U7.8 | length 54.5
  Top Layer w0.381: J1.5 29.572,64.47 31.069,64.47 v1(31.115,64.516) ; J2.9@33.769,55.753 J2.9 34.671,55.626 v1(34.671,54.483) ; v1(34.036,62.865) 34.067,62.896 34.067,64.358 U1.2 ; J2.5 33.769,58.293 33.304,58.758 32.936,58.758 v1(32.766,58.928) 33.223,59.385 34.62,59.385 J2.3 ; v1(36.854,39.502) 36.856,39.499 38.122,39.499 R3.1 ; C3.1 41.116,41.816 41.116,43.275 v1(41.148,43.307) 41.148,44.654 U2.32 ; v1(42.418,67.437) 42.449,67.468 43.784,67.468 C4.1 ; v1(45.085,38.227) C6.1 ; U3.2 v1(46.101,71.501) ; v1(46.85,66.053) 46.889,66.014 48.525,66.014 C5.1@48.597,65.942 ; U2.14 49.799,48.758 51.177,48.758 v3(51.274,48.855) ; U2.16@50.169,50.298 U2.16 49.784,50.342 v1(49.784,51.308) 49.943,51.467 51.022,51.467 C19.1 ; C2.1 51.056,52.895 52.261,52.895 v1(52.324,52.959) 52.324,53.2 52.062,53.461 52.062,54.302 C1.1 ; v1(65.532,44.069) 65.564,44.037 66.896,44.037 C11.1 66.961,44.037 U6.2@68.128,44.037 ; v1(65.532,66.548) 65.564,66.516 C15.1@66.834,66.516 ; v1(65.786,55.245) 65.818,55.213 66.896,55.213 C10.1 66.961,55.213 68.942,55.213 U5.2 ; C15.1@66.717,66.506 U7.2@68.902,66.506 ; v1(66.929,58.928) U7.8@68.961,58.928 ; v1(67.056,36.449) U6.8@68.834,36.449 ; v1(67.056,47.625) U5.8@68.707,47.625 ; U6.2@68.128,44.069 U6.2
  Top Layer w0.762: J1.S2@29.018,62.98 28.468,62.98 J1.S3 J1.S4 28.468,68.542 J1.S1@29.018,68.542 ; J1.S2 29.375,62.522 30.823,62.522 v1(30.861,62.484) ; J1.S1 29.4,69.025 30.67,69.025 v1(30.734,69.088)
GNDB: C10_MOTOR_DRIVE_1.1 C10_MOTOR_DRIVE_2.1 C10_MOTOR_DRIVE_3.1 C11_MOTOR_DRIVE_1.1 C11_MOTOR_DRIVE_2.1 C11_MOTOR_DRIVE_3.1 C12_MOTOR_DRIVE_1.N C12_MOTOR_DRIVE_2.N C12_MOTOR_DRIVE_3.N C13.1 C13_MOTOR_DRIVE_1.1 C13_MOTOR_DRIVE_2.1 C13_MOTOR_DRIVE_3.1 C14.1 C16.1 C17.1 C18.1 C20.1 C21.1 C22.1 C23.2 C26.1 C27.1 C28.1 C29.1 C30.1 C31.1 C32.1 C33.1 C34.1 J3.1 J7.3 J7.4 P2.1 Q1.4 R2.1 R6.2 R10_MOTOR_DRIVE_1.2 R10_MOTOR_DRIVE_2.2 R10_MOTOR_DRIVE_3.2 R11_MOTOR_DRIVE_1.2 R11_MOTOR_DRIVE_2.2 R11_MOTOR_DRIVE_3.2 R12_MOTOR_DRIVE_1.2 R12_MOTOR_DRIVE_2.2 R12_MOTOR_DRIVE_3.2 R13_MOTOR_DRIVE_1.2 R13_MOTOR_DRIVE_2.2 R13_MOTOR_DRIVE_3.2 R14_MOTOR_DRIVE_1.2 R14_MOTOR_DRIVE_2.2 R14_MOTOR_DRIVE_3.2 U1_MOTOR_DRIVE_1.6 U1_MOTOR_DRIVE_2.6 U1_MOTOR_DRIVE_3.6 U5.9 U5.15 U6.9 U6.15 U7.9 U7.15 U8.5 U8.9 | length 87.4
  Top Layer w0.254: R14_MOTOR_DRIVE_2.2 90.397,57.023 91.059,56.361 v1(91.059,56.122)
  Top Layer w0.381: R6.2@26.695,83.603 R6.2 26.77,83.578 28.179,82.169 v1(28.321,82.169) ; C21.1@28.246,83.603 28.271,83.628 C21.1 v1(28.321,82.169) ; C23.2 29.78,82.042 28.448,82.042 v1(28.321,82.169) ; C17.1 v1(38.1,90.805) ; R2.1 v1(61.849,77.978) ; Q1.4 63.981,83.566 v1(64.643,83.566) ; U5.15 73.775,55.244 75.692,55.244 75.723,55.213 77.184,55.213 v1(77.216,55.245) ; U6.15 73.829,44.027 75.858,44.027 C14.1 76.011,44.004 77.151,44.004 v1(77.216,44.069) ; U7.9 v1(75.819,58.928) ; U7.15 73.829,66.506 C16.1@75.819,66.506 ; U6.9@74.041,36.449 v1(75.819,36.449) ; U5.9@74.041,47.625 v1(75.819,47.625) ; C16.1 75.915,66.452 76.993,66.452 v1(77.089,66.548) ; v1(81.407,86.36) 81.577,86.19 v1@81.679,86.19 ; v1(81.407,88.011) 81.577,87.841 v1@81.577,87.592 ; v1(83.947,62.484) 84.842,62.484 ; R12_MOTOR_DRIVE_2.2 R13_MOTOR_DRIVE_2.2 84.842,61.601 84.842,62.484 ; R11_MOTOR_DRIVE_2.2 R10_MOTOR_DRIVE_2.2 84.842,63.367 84.842,62.484 ; v1(85.344,84.963) 86.372,84.963 ; v1(86.106,42.291) 87.146,42.291 ; R12_MOTOR_DRIVE_1.2 R13_MOTOR_DRIVE_1.2 86.372,84.963 ; R11_MOTOR_DRIVE_1.2 R10_MOTOR_DRIVE_1.2 86.372,84.963 ; R12_MOTOR_DRIVE_3.2 87.134,39.636 87.134,41.39 R13_MOTOR_DRIVE_3.2 87.146,42.291 ; R11_MOTOR_DRIVE_3.2 R10_MOTOR_DRIVE_3.2 87.146,42.291 ; v1(92.075,36.818) R14_MOTOR_DRIVE_3.2 ; v1(93.218,74.422) R14_MOTOR_DRIVE_1.2 ; C10_MOTOR_DRIVE_3.1 95.427,34.733 95.969,34.191 95.969,33.825 v1(96.139,33.655) ; C10_MOTOR_DRIVE_1.1@97.359,75.181 C10_MOTOR_DRIVE_1.1 97.536,75.054 97.536,74.103 v1(97.663,73.976)
  Top Layer w0.762: C26.1 39.389,89.111 C26.1@39.581,89.111 ; 39.878,89.092 C27.1 ; v2(40.64,90.297) C27.1 ; C28.1 C27.1 ; C18.1 46.609,88.584 ; v2(46.609,89.789) 46.609,88.584 ; v2(47.371,80.137) 48.641,81.407 48.83,81.407 ; v2(47.371,85.217) 48.83,85.217 ; C34.1 48.83,81.407 ; C30.1 48.83,85.217 ; v2(49.149,89.789) 49.149,88.584 ; C29.1 49.149,88.584 ; v1(81.407,86.36) v1(79.756,86.36) 77.978,86.36 76.581,87.757 P2.1 ; v1(81.407,88.011) v1(79.756,88.011) P2.1 ; v1(81.407,89.662) v1(79.756,89.662) 77.978,89.662 76.581,88.265 P2.1 ; C10_MOTOR_DRIVE_2.1 v1(96.012,55.753) ; 46.609,88.584 C20.1 C22.1 49.149,88.584 ; 48.83,81.407 C33.1 C32.1 C31.1 48.83,85.217
  other v1: 97.409,39.624 99.314,39.624 102.108,39.624 99.314,41.402 102.108,41.402 99.314,43.18 102.108,43.18 97.282,44.958 99.314,44.958 102.108,44.958 97.028,61.214 100.584,61.214 102.616,61.214 95.885,62.738 101.473,62.992 97.155,64.008 95.631,64.77 100.584,64.897 102.616,64.897 30.226,78.105 33.02,78.105 36.322,78.105 34.544,79.248 30.226,80.137 33.02,80.137 36.322,80.137 34.544,81.661 98.552,81.915 100.838,81.915 102.997,81.915 33.02,82.677 36.322,82.677 98.552,83.82 100.838,83.82 102.997,83.82 34.544,83.947 32.893,85.09 98.552,85.979 100.838,85.979 102.997,85.979 34.417,86.487 33.02,87.757 34.417,88.9
  other v2: 103.124,62.992
I2C_SCL: J9.4 U2.18 | length 20.6
  Top Layer w0.381: U2.18@47.406,51.712 U2.18 47.466,53.835 49.775,56.144 49.775,60.316 v1(49.784,60.325)
  Bottom Layer w0.381: v1(49.784,60.325) 51.054,60.325 J9.4
I2C_SDA: J9.2 U2.28 | length 37.6
  Top Layer w0.381: v1(36.195,52.07) 37.211,51.054 37.973,51.054 38.862,50.165 38.862,49.022 39.941,47.942 41.148,47.942 U2.28 U2.28@41.252,47.838
  Bottom Layer w0.381: v1(36.195,52.07) 36.195,53.467 39.235,56.507 41.521,56.507 45.787,60.773 45.787,61.317 54.194,69.723 J9.2
IR_IN: J8.2 U2.10 | length 23.6
  Top Layer w0.381: U2.10 50.768,45.498 v1(52.324,43.942) ; v1(56.261,48.006) 56.261,55.118 56.642,55.499 56.642,59.055 J8.2
  Bottom Layer w0.381: v1(52.324,43.942) 55.245,43.942 55.753,44.45 55.753,46.482 56.261,46.99 v1(56.261,48.006)
M1_ENC_A: J4.3 U2.11 | length 31.5
  Top Layer w0.381: U2.11 51.111,46.298 51.732,45.677 53.043,45.677 v1(53.213,45.847)
  Bottom Layer w0.381: J4.3 32.893,51.943 36.131,48.704 46.926,48.704 49.784,45.847 v1(53.213,45.847)
M1_ENC_B: J4.4 U2.9 | length 21.6
  Top Layer w0.381: v1(46.736,46.355) 46.87,46.221 47.546,46.221 49.009,44.758 49.68,44.758 U2.9
  Bottom Layer w0.381: J4.4 32.766,50.673 35.319,48.12 44.971,48.12 v1(46.736,46.355)
M1_PWM_1: U2.5 U5.3 | length 38
  Top Layer w0.381: U2.5 45.926,43.165 45.926,42.21 49.147,38.989 v1(58.42,38.989) ; v1(61.849,53.213) 62.031,53.213 62.793,53.975 U5.3
  Bottom Layer w0.381: v1(58.42,38.989) 58.42,42.926 61.849,46.355 v1(61.849,53.213)
M1_PWM_1B: U1_MOTOR_DRIVE_1.9 U5.14 | length 53.5
  Top Layer w0.254: U5.14 78.105,53.975 v1(79.248,55.118) ; v1(82.804,84.836) 82.804,88.011 84.074,89.281 89.114,89.281 91.019,87.376 91.922,87.376 92.704,86.594 92.704,86.238 U1_MOTOR_DRIVE_1.9
  Bottom Layer w0.254: v1(79.248,55.118) 79.248,59.817 77.724,61.341 77.724,64.77 78.867,65.913 78.867,80.899 v1(82.804,84.836)
M1_PWM_2: U2.6 U5.4 | length 33.5
  Top Layer w0.381: U2.6 46.726,43.165 46.726,42.308 48.902,40.132 v1(56.261,40.132) ; v1(60.579,51.562) 62.865,51.562 64.008,52.705 U5.4
  Bottom Layer w0.381: v1(56.261,40.132) 56.261,42.291 60.579,46.609 v1(60.579,51.562)
M1_PWM_2B: U1_MOTOR_DRIVE_1.10 U5.13 | length 52.5
  Top Layer w0.254: U5.13@73.914,52.705 79.756,52.705 81.28,54.229 81.28,76.073 v1(82.804,77.597) ; v1(84.074,87.122) 84.074,88.138 84.582,88.646 89.027,88.646 91.264,86.409 92.204,86.409 92.206,86.407 U1_MOTOR_DRIVE_1.10
  Bottom Layer w0.254: v1(82.804,77.597) 82.804,77.645 84.074,78.915 v1(84.074,87.122)
M2_ENC_A: J5.3 U2.29 | length 21.8
  Top Layer w0.381: v1(35.687,46.101) 35.687,46.119 36.666,47.098 U2.29
  Bottom Layer w0.381: J5.3 26.67,44.679 26.67,48.006 27.686,49.022 30.734,49.022 33.655,46.101 v1(35.687,46.101)
M2_ENC_B: J5.4 U2.30 | length 17
  Top Layer w0.381: v1(34.671,44.704) 36.83,44.704 38.424,46.298 U2.30
  Bottom Layer w0.381: J5.4 29.337,43.282 29.337,45.37 29.665,45.698 32.153,45.698 33.274,44.577 34.544,44.577 v1(34.671,44.704)
M2_PWM_1: U2.19 U5.5 | length 28.2
  Top Layer w0.381: U2.19 46.666,54.752 47.498,55.584 v1(47.498,55.626) ; v1(58.166,51.562) 59.245,50.482 63.309,50.482 64.262,51.435 U5.5
  Bottom Layer w0.381: v1(47.498,55.626) 54.102,55.626 v1(58.166,51.562)
M2_PWM_1B: U1_MOTOR_DRIVE_2.9 U5.12 | length 33.3
  Top Layer w0.254: U5.12 80.391,51.435 81.737,52.781 81.737,65.608 83.469,67.34 86.891,67.34 89.718,64.514 91.107,64.514 91.338,64.283 91.338,64.175 91.379,64.134 91.379,63.886 U1_MOTOR_DRIVE_2.9
M2_PWM_2: U2.20 U5.6 | length 33.1
  Top Layer w0.381: U2.20 45.866,56.42 46.228,56.782 v1(46.228,57.023) ; v1(58.166,49.53) 63.881,49.53 64.613,50.262 66.199,50.262 66.297,50.165 U5.6
  Bottom Layer w0.381: v1(46.228,57.023) 46.228,54.452 46.451,54.229 53.213,54.229 57.567,49.875 57.58,49.875 57.925,49.53 v1(58.166,49.53)
M2_PWM_2B: U1_MOTOR_DRIVE_2.10 U5.11 | length 32.5
  Top Layer w0.254: U5.11@74.041,50.165 80.518,50.165 82.194,51.841 82.194,64.922 83.82,66.548 86.868,66.548 89.359,64.057 90.879,64.057 90.881,64.055 U1_MOTOR_DRIVE_2.10
M3_ENC_A: J6.3 U2.25 | length 25.1
  Top Layer w0.381: J6.3 29.483,35.96 29.483,36.376 33.113,40.006 33.113,45.305 v1(37.592,49.784) ; v1(40.132,52.197) 41.192,51.137 U2.25
  Bottom Layer w0.381: v1(37.592,49.784) 37.655,49.784 40.069,52.197 v1(40.132,52.197)
M3_ENC_B: J6.4 U2.31 | length 17.7
  Top Layer w0.381: J6.4 34.003,36.67 34.003,40.099 39.402,45.498 U2.31
M3_PWM_1: U2.7 U6.3 | length 22.9
  Top Layer w0.381: U2.7 47.526,43.284 47.526,43.935 47.863,44.272 48.669,44.272 48.827,44.114 48.85,44.114 50.165,42.799 U6.3
M3_PWM_1B: U1_MOTOR_DRIVE_3.9 U6.14 | length 23.1
  Top Layer w0.254: U6.14 80.779,42.799 84.589,46.609 89.535,46.609 91.823,44.321 93.575,44.321 93.847,44.049 93.847,43.693 U1_MOTOR_DRIVE_3.9
M3_PWM_2: U2.8 U6.4 | length 21.4
  Top Layer w0.381: U2.8 48.913,43.224 50.609,41.529 U6.4
M3_PWM_2B: U1_MOTOR_DRIVE_3.10 U6.13 | length 22.3
  Top Layer w0.254: U6.13 81.153,41.529 85.598,45.974 89.281,45.974 91.391,43.864 U1_MOTOR_DRIVE_3.10@93.347,43.864
M_OUT_+_MOTOR_DRIVE_1: P3.1 U1_MOTOR_DRIVE_1.5 | length 2.2
  Top Layer w0.508: P3.1@106.299,79.248 P3.1
M_OUT_+_MOTOR_DRIVE_2: P5.1 U1_MOTOR_DRIVE_2.5 | length 0
  Top Layer w0.508: U1_MOTOR_DRIVE_2.5 U1_MOTOR_DRIVE_2.5@93.16,61.567
M_OUT_+_MOTOR_DRIVE_3: P7.1 U1_MOTOR_DRIVE_3.5 | length 0.5
  Top Layer w0.508: P7.1@107.442,37.338 P7.1
M_OUT_-_MOTOR_DRIVE_1: P4.1 U1_MOTOR_DRIVE_1.7 | length 1.4
  Top Layer w0.508: P4.1@106.807,88.646 P4.1
M_OUT_-_MOTOR_DRIVE_2: P6.1 U1_MOTOR_DRIVE_2.7 | length 1.6
  Top Layer w0.508: P6.1@106.68,66.929 P6.1
M_OUT_-_MOTOR_DRIVE_3: P8.1 U1_MOTOR_DRIVE_3.7
NetC21_2: C21.2 U8.3 | length 2.4
  Top Layer w0.508: C21.2@28.448,85.105 U8.3@30.686,85.105
  Top Layer w0.762: C21.2 28.371,85.028 C21.2@28.448,85.105
NetC23_1: C23.1 U8.4 | length 2
  Top Layer w0.508: U8.4@31.161,83.835 31.207,83.789 31.207,82.015 C23.1
NetC24_1: C24.1 R5.2 R6.1 U8.2 | length 5.3
  Top Layer w0.508: R6.1 R5.2 26.701,86.391 28.29,86.391 C24.1 28.344,86.399 30.662,86.399 U8.2@30.686,86.375
NetC25_1: C25.1 L1.1 U8.6 | length 5.7
  Top Layer w0.508: C25.1@38.05,84.898 C25.1
  Top Layer w0.635: U8.6@36.355,85.09 36.373,85.072 37.875,85.072 C25.1@38.05,84.898 ; C25.1 38.15,84.898 L1.1@40.886,82.161
NetC25_2: C25.2 U8.7 | length 2
  Top Layer w0.508: U8.7@36.086,86.375 36.124,86.336 38.061,86.336 C25.2
NetD1_2: D1.2 R1.2 | length 5.8
  Top Layer w0.5: R1.2 47.034,63.385 47.935,62.484 D1.2
NetD2_2: D2.2 R2.2 | length 1.2
  Top Layer w0.508: D2.2@57.723,77.978 R2.2
NetD3_1: D3.1 U2.2 | length 4.4
  Top Layer w0.381: D3.1 42.483,39.514 42.693,39.724 43.153,39.724 43.466,40.037 U2.2
NetD3_2: D3.2 R3.2 | length 1.5
  Top Layer w0.381: R3.2 D3.2@41.148,39.497
NetD4_MOTOR_DRIVE_1_1: D4_MOTOR_DRIVE_1.1 R15_MOTOR_DRIVE_1.1 | length 4.4
  Top Layer w0.381: R15_MOTOR_DRIVE_1.1 95.25,74.803 96.43,73.623 D4_MOTOR_DRIVE_1.1
NetD4_MOTOR_DRIVE_1_2: D4_MOTOR_DRIVE_1.2 U1_MOTOR_DRIVE_1.1 | length 17.3
  Top Layer w0.254: U1_MOTOR_DRIVE_1.1 92.206,83.265 92.204,83.263 90.756,83.263 89.535,82.042 89.535,78.486 91.948,76.073 91.948,72.39 92.583,71.755 D4_MOTOR_DRIVE_1.2
NetD4_MOTOR_DRIVE_2_1: D4_MOTOR_DRIVE_2.1 R15_MOTOR_DRIVE_2.1 | length 1.8
  Top Layer w0.381: D4_MOTOR_DRIVE_2.1@92.616,54.388 D4_MOTOR_DRIVE_2.1 92.735,54.319 94.336,54.319 R15_MOTOR_DRIVE_2.1
NetD4_MOTOR_DRIVE_2_2: D4_MOTOR_DRIVE_2.2 U1_MOTOR_DRIVE_2.1 | length 10.7
  Top Layer w0.254: U1_MOTOR_DRIVE_2.1 90.881,60.913 90.879,60.911 90.248,60.911 89.281,59.944 89.281,56.134 D4_MOTOR_DRIVE_2.2@92.583,52.832
NetD4_MOTOR_DRIVE_3_1: D4_MOTOR_DRIVE_3.1 R15_MOTOR_DRIVE_3.1 | length 2.5
  Top Layer w0.254: R15_MOTOR_DRIVE_3.1 R15_MOTOR_DRIVE_3.1@93.826,34.683
  Top Layer w0.381: R15_MOTOR_DRIVE_3.1 93.726,34.163 94.488,33.401 94.488,32.732 D4_MOTOR_DRIVE_3.1
NetD4_MOTOR_DRIVE_3_2: D4_MOTOR_DRIVE_3.2 U1_MOTOR_DRIVE_3.1 | length 11
  Top Layer w0.254: D4_MOTOR_DRIVE_3.2@93.218,32.639 93.218,32.652 92.908,32.962 92.895,32.962 91.059,34.798 91.059,40.005 91.772,40.718 93.347,40.718 93.349,40.72 U1_MOTOR_DRIVE_3.1
NetP1_1: P1.1 Q1.5 | length 9.7
  Top Layer w1.778: Q1.5 62.611,86.741 70.739,86.741 P1.1@71.247,87.249
NetR1_1: R1.1 U3.4 | length 2.6
  Top Layer w0.5: U3.4 45.182,67.473 45.182,64.915 R1.1
NetR4_1: R4.1 U8.1 | length 4.7
  Top Layer w0.508: U8.1@30.686,87.645 U8.1 31.042,87.691 31.042,90.085 31.508,90.551 R4.1
NetR10_MOTOR_DRIVE_1_1: R10_MOTOR_DRIVE_1.1 U1_MOTOR_DRIVE_1.12 | length 4
  Top Layer w0.254: R10_MOTOR_DRIVE_1.1 89.4,85.852 90.162,85.09 91.429,85.09 91.431,85.088 U1_MOTOR_DRIVE_1.12@91.508,85.088
NetR10_MOTOR_DRIVE_2_1: R10_MOTOR_DRIVE_2.1 U1_MOTOR_DRIVE_2.12 | length 4.4
  Top Layer w0.254: R10_MOTOR_DRIVE_2.1 87.63,63.373 88.269,62.734 U1_MOTOR_DRIVE_2.12
  Top Layer w0.381: R10_MOTOR_DRIVE_2.1@86.348,63.273 R10_MOTOR_DRIVE_2.1
NetR10_MOTOR_DRIVE_3_1: R10_MOTOR_DRIVE_3.1 U1_MOTOR_DRIVE_3.12 | length 4.4
  Top Layer w0.254: R10_MOTOR_DRIVE_3.1 89.662,43.18 90.301,42.541 U1_MOTOR_DRIVE_3.12
NetR11_MOTOR_DRIVE_1_1: R11_MOTOR_DRIVE_1.1 U1_MOTOR_DRIVE_1.11 | length 4.6
  Top Layer w0.254: R11_MOTOR_DRIVE_1.1 89.027,87.503 90.944,85.586 U1_MOTOR_DRIVE_1.11
NetR11_MOTOR_DRIVE_2_1: R11_MOTOR_DRIVE_2.1 U1_MOTOR_DRIVE_2.11 | length 4.9
  Top Layer w0.254: R11_MOTOR_DRIVE_2.1 87.249,65.278 89.293,63.234 U1_MOTOR_DRIVE_2.11
  Top Layer w0.381: R11_MOTOR_DRIVE_2.1 R11_MOTOR_DRIVE_2.1@86.372,65.254
NetR11_MOTOR_DRIVE_3_1: R11_MOTOR_DRIVE_3.1 U1_MOTOR_DRIVE_3.11 | length 5
  Top Layer w0.254: R11_MOTOR_DRIVE_3.1 89.281,44.958 91.198,43.041 U1_MOTOR_DRIVE_3.11
NetR12_MOTOR_DRIVE_1_1: R12_MOTOR_DRIVE_1.1 U1_MOTOR_DRIVE_1.14 | length 4.5
  Top Layer w0.254: R12_MOTOR_DRIVE_1.1 89.154,82.423 90.817,84.086 U1_MOTOR_DRIVE_1.14
NetR12_MOTOR_DRIVE_2_1: R12_MOTOR_DRIVE_2.1 U1_MOTOR_DRIVE_2.14 | length 4.8
  Top Layer w0.254: R12_MOTOR_DRIVE_2.1 87.63,59.817 89.547,61.734 U1_MOTOR_DRIVE_2.14
NetR12_MOTOR_DRIVE_3_1: R12_MOTOR_DRIVE_3.1 U1_MOTOR_DRIVE_3.14 | length 5
  Top Layer w0.254: R12_MOTOR_DRIVE_3.1 89.281,39.624 91.198,41.541 U1_MOTOR_DRIVE_3.14
NetR13_MOTOR_DRIVE_1_1: R13_MOTOR_DRIVE_1.1 U1_MOTOR_DRIVE_1.13 | length 4
  Top Layer w0.254: R13_MOTOR_DRIVE_1.1 89.662,84.074 90.174,84.586 U1_MOTOR_DRIVE_1.13
NetR13_MOTOR_DRIVE_2_1: R13_MOTOR_DRIVE_2.1 U1_MOTOR_DRIVE_2.13 | length 4.3
  Top Layer w0.254: R13_MOTOR_DRIVE_2.1 87.63,61.595 88.269,62.234 U1_MOTOR_DRIVE_2.13
NetR13_MOTOR_DRIVE_3_1: R13_MOTOR_DRIVE_3.1 U1_MOTOR_DRIVE_3.13 | length 4.4
  Top Layer w0.254: R13_MOTOR_DRIVE_3.1 89.662,41.402 90.301,42.041 U1_MOTOR_DRIVE_3.13
NetR14_MOTOR_DRIVE_1_1: R14_MOTOR_DRIVE_1.1 U1_MOTOR_DRIVE_1.2 | length 10.2
  Top Layer w0.254: U1_MOTOR_DRIVE_1.2 92.706,82.842 92.473,82.608 91.007,82.608 90.043,81.645 90.043,79.248 92.075,77.216 93.194,77.216 R14_MOTOR_DRIVE_1.1
NetR14_MOTOR_DRIVE_2_1: R14_MOTOR_DRIVE_2.1 U1_MOTOR_DRIVE_2.2 | length 2.8
  Top Layer w0.254: R14_MOTOR_DRIVE_2.1@90.424,58.662 90.424,59.69 91.379,60.645 91.379,61.082 U1_MOTOR_DRIVE_2.2
NetR14_MOTOR_DRIVE_3_1: R14_MOTOR_DRIVE_3.1 U1_MOTOR_DRIVE_3.2 | length 2.6
  Top Layer w0.254: R14_MOTOR_DRIVE_3.1 92.182,39.592 92.906,39.592 93.847,40.533 93.847,40.889 U1_MOTOR_DRIVE_3.2
NRST: C6.2 J2.10 U2.4 | length 27.1
  Top Layer w0.381: v1(33.909,47.752) 33.909,51.829 37.833,55.753 J2.10 ; C6.2 45.076,40.903 45.076,43.215 U2.4 45.076,43.234 45.076,45.076 v1(45.085,45.085)
  Bottom Layer w0.381: v1(33.909,47.752) 34.079,47.582 34.493,47.582 34.577,47.498 42.672,47.498 v1(45.085,45.085)
NSLEEP: U2.26 U7.4 | length 50.8
  Top Layer w0.381: v2(38.354,53.213) 38.354,51.686 40.482,49.558 41.133,49.558 U2.26 ; v2(57.531,54.102) 58.547,53.086 59.563,53.086 62.611,56.134 62.611,61.595 65.024,64.008 U7.4
  Bottom Layer w0.381: v2(38.354,53.213) 38.395,53.213 39.03,53.848 40.259,53.848 41.656,52.451 42.418,52.451 43.307,53.34 43.307,56.134 45.593,58.42 46.99,58.42 47.498,57.912 52.832,57.912 56.642,54.102 v2(57.531,54.102)
nSLEEP_MOTOR_DRIVE_1: U1_MOTOR_DRIVE_1.3 U1_MOTOR_DRIVE_2.3 U1_MOTOR_DRIVE_3.3 U7.13 | length 130.8
  Top Layer w0.254: U1_MOTOR_DRIVE_2.3@91.87,60.989 91.836,60.956 91.836,60.253 91.186,59.603 91.186,57.785 91.694,57.277 96.51,57.277 97.526,56.261 v2(102.616,56.261) ; U1_MOTOR_DRIVE_1.3 93.206,82.451 92.329,81.574 92.329,80.732 93.262,79.8 94.19,79.8 96.139,77.851 98.171,77.851 101.6,74.422 v2(101.6,69.977) ; v3(93.853,39.243) 93.853,39.449 94.349,39.945 U1_MOTOR_DRIVE_3.3
  Top Layer w0.508: U7.13 74.587,64.008 75.857,62.738 77.978,62.738 v2(79.121,63.881) ; v2(85.598,69.215) 90.043,69.215 v2(90.805,69.977)
  Bottom Layer w0.508: v2(79.121,63.881) 84.455,69.215 v2(85.598,69.215) ; v2(90.805,69.977) v2(101.6,69.977) 104.013,69.977 109.093,64.897 109.093,60.325 105.029,56.261 v2(102.616,56.261) 102.616,54.102 108.585,48.133 108.585,37.973 105.664,35.052 100.203,35.052 99.568,34.417 97.663,34.417 96.393,35.687 96.393,37.973 95.099,39.267 93.877,39.267 v3(93.853,39.243)
SWCLK: J2.4 U2.24 | length 10
  Top Layer w0.381: J2.4 39.04,59.385 40.178,59.385 42.666,56.897 U2.24
SWDIO: J2.2 U2.23 | length 11.6
  Top Layer w0.381: J2.2 39.04,60.655 40.164,60.655 43.466,57.353 U2.23
TRW_PWM: U2.27 U6.5 | length 52.8
  Top Layer w0.381: U2.27 41.252,48.758 41.903,48.758 42.24,49.095 42.24,50.747 41.843,51.144 41.843,52.959 41.652,53.149 41.652,54.233 v1(41.529,54.356) ; v1(63.119,40.259) U6.5
  Bottom Layer w0.381: v1(41.529,54.356) 41.529,55.372 45.402,59.245 52.514,59.245 55.229,56.531 60.593,56.531 63.119,54.006 v1(63.119,40.259)
TRW_PWM_B: J3.2 U6.12 | length 10.4
  Top Layer w0.508: U6.12 v1(77.343,40.259)
  Bottom Layer w0.508: J3.2 76.708,33.743 77.343,34.378 v1(77.343,40.259)
TRW_SERVO: U2.12 U7.3 | length 37.7
  Top Layer w0.381: U2.12 53.997,47.098 55.562,45.532 55.562,45.527 56.449,44.64 57.343,44.64 58.42,45.717 v1(58.42,47.625) ; v1(59.436,54.991) 59.436,56.762 61.595,58.921 61.595,64.135 62.738,65.278 U7.3@68.961,65.278
  Bottom Layer w0.381: v1(58.42,47.625) 59.436,48.641 v1(59.436,54.991)
TRW_SERVO_B: J7.2 U7.14 | length 35.2
  Top Layer w0.381: U7.14 75.459,65.278 76.221,64.516 v1(76.327,64.516)
  Bottom Layer w0.5: J7.2@55.604,86.357 58.776,83.185 61.976,83.185 73.152,72.009 73.152,67.691 v1(76.327,64.516)
USB_D+: J1.3 U1.3 U2.22 | length 25.2
  Top Layer w0.381: J1.3 31.852,65.761 32.356,65.257 34.714,65.257 34.938,65.034 34.938,64.498 U1.3 39.11,64.389 44.266,59.233 U2.22
USB_D-: J1.2 U1.4 U2.21 | length 28.4
  Top Layer w0.381: J1.2 32.141,66.411 32.639,65.913 34.824,65.913 35.047,66.136 U1.4 39.11,66.989 45.066,61.033 U2.21
V_BATT: C11_MOTOR_DRIVE_1.2 C11_MOTOR_DRIVE_2.2 C11_MOTOR_DRIVE_3.2 C12_MOTOR_DRIVE_1.P C12_MOTOR_DRIVE_2.P C12_MOTOR_DRIVE_3.P C13_MOTOR_DRIVE_1.2 C13_MOTOR_DRIVE_2.2 C13_MOTOR_DRIVE_3.2 C17.2 C26.2 C27.2 C28.2 Q1.1 Q1.2 Q1.3 R4.2 U1_MOTOR_DRIVE_1.4 U1_MOTOR_DRIVE_2.4 U1_MOTOR_DRIVE_3.4 U8.8 | length 188.4
  Top Layer w0.483: v1@93.187,88.804 v1(93.218,88.773) 93.781,88.21 U1_MOTOR_DRIVE_1.4 93.781,81.802 93.345,81.366 v1(93.345,81.153) ; v1(93.98,46.101) 94.924,45.157 94.924,38.368 94.488,37.932 v1(94.488,37.719)
  Top Layer w0.508: R4.2 35.448,90.551 36.086,89.913 U8.8@36.086,87.645 ; 64.008,80.2 64.199,80.391 ; v1(92.019,66.731) 92.019,66.524 92.465,66.079 92.465,63.808 U1_MOTOR_DRIVE_2.4@92.46,63.803 ; v1(92.202,59.182) 92.202,59.388 92.456,59.642 U1_MOTOR_DRIVE_2.4@92.456,60.988
  Top Layer w0.635: U8.8@36.086,87.645 37.627,87.645
  Top Layer w0.762: C17.2 C26.2 C27.2 C28.2@41.847,87.692 ; C28.2 41.929,87.711 42.753,87.711 44.069,89.027 44.069,90.297 45.212,91.44 56.515,91.44 58.039,89.916 58.039,82.423 60.071,80.391 Q1.1 ; 61.341,80.391 Q1.2 ; 62.611,80.391 Q1.3
  Top Layer w1.778: 60.071,80.391 61.341,80.391 62.611,80.391 64.199,80.391 84.034,80.391 C12_MOTOR_DRIVE_1.P@88.479,75.946
  Bottom Layer w1.778: C12_MOTOR_DRIVE_3.P@88.606,34.671 88.606,42.291 ; C12_MOTOR_DRIVE_3.P 93.218,34.671 94.488,35.941 v1(94.488,37.719) ; v1(91.948,62.611) 88.519,62.611 ; v1(92.019,66.731) 91.313,67.437 88.519,67.437 ; v1(92.202,59.182) 91.694,58.674 88.519,58.674 ; v1(93.218,88.773) 93.345,88.646 v1(93.345,81.153) 93.345,80.812 C12_MOTOR_DRIVE_1.P 88.519,75.986 88.519,67.437 ; v1(93.98,46.101) 93.218,45.339 88.606,45.339 ; v1(94.361,42.291) 88.606,42.291 ; 88.519,58.674 88.519,62.611 ; 88.519,58.674 88.519,55.031 C12_MOTOR_DRIVE_2.P 88.479,45.466 88.606,45.339 ; 88.519,62.611 88.519,67.437 ; 88.606,42.291 88.606,45.339
  other v1: 93.218,84.836
pads on no net: J1.4 J2.6 J2.7 J2.8 J3. J3.3 J3.4 J4. J5. J6. J7. J8. J9. U1.1 U2.3 U3.1@47.801,70.104 U5.7 U5.10 U6.7 U6.10 U7.5 U7.6 U7.7 U7.10 U7.11 U7.12

## Polygon pours and split planes (outlines as drawn)
GNDB on Top Layer "NONET_L01_P034" (solid, pour order 34): 32.258,80.772 29.21,80.772 28.956,80.518 28.956,77.597 29.337,77.216 36.703,77.216 37.338,77.851 37.338,83.947 34.544,83.947 32.258,83.439
M_OUT_+_MOTOR_DRIVE_2 on Top Layer "M_OUT_+_MOTOR_DRIVE_2_L01_P020" (solid, pour order 20): 93.345,60.579 94.107,59.817 106.172,59.817 106.172,58.039 95.123,58.039 94.488,58.039 92.964,59.563 92.964,61.087 93.218,61.087 93.345,60.96
M_OUT_+_MOTOR_DRIVE_1 on Top Layer "M_OUT_+_MOTOR_DRIVE_1_L01_P027" (solid, pour order 27): 94.234,83.185 94.234,81.153 97.155,78.232 105.156,78.232 106.045,79.121 106.045,80.899 104.648,80.899 104.394,80.645 96.774,80.645 94.742,82.677 94.742,83.185
M_OUT_+_MOTOR_DRIVE_3 on Top Layer "M_OUT_+_MOTOR_DRIVE_3_L01_P019" (solid, pour order 19): 95.377,40.767 95.885,40.767 95.885,39.751 97.282,38.354 105.791,38.354 105.791,36.322 104.775,37.338 97.028,37.338 95.25,39.116 95.25,40.259 95.377,40.386 95.377,40.767 95.758,40.767 95.885,40.64
M_OUT_-_MOTOR_DRIVE_3 on Top Layer "M_OUT_-_MOTOR_DRIVE_3_L01_P018" (solid, pour order 18): 95.885,45.085 96.774,45.974 108.204,45.974 106.553,47.752 96.52,47.752 95.377,46.609 95.377,43.942 95.758,43.942 95.885,43.942 95.758,43.942 95.885,44.069
GNDB on Top Layer "GNDB_L01_P035" (solid, pour order 35): 32.385,88.011 31.75,88.646 31.75,89.535 35.56,89.535 35.56,88.519 35.052,88.011
GNDB on Top Layer "GNDB_L01_P004" (solid, pour order 4): 94.996,86.741 95.885,87.63 101.473,87.63 102.362,86.741 104.013,86.741 104.013,81.026 97.155,81.026 94.996,83.185
GNDB on Top Layer "GNDB_L01_P005" (solid, pour order 5): 93.711,64.501 94.869,65.659 104.267,65.659 104.267,60.198 94.361,60.198 93.711,60.848
GNDB on Top Layer "GNDB_L01_P006" (solid, pour order 6): 96.139,44.831 97.028,45.72 103.251,45.72 103.251,38.608 97.409,38.608 96.139,39.878 96.139,44.069
M_OUT_-_MOTOR_DRIVE_2 on Top Layer "M_OUT_-_MOTOR_DRIVE_2_L01_P023" (solid, pour order 23): 93.345,64.135 93.345,64.77 94.488,65.913 105.918,65.913 105.918,67.437 94.361,67.437 92.964,66.04 92.964,64.135
M_OUT_-_MOTOR_DRIVE_1 on Top Layer "M_OUT_-_MOTOR_DRIVE_1_L01_P024" (solid, pour order 24): 94.615,86.487 94.615,87.122 95.631,88.138 106.299,88.138 106.299,89.281 105.791,89.789 94.996,89.789 94.234,89.027 94.234,86.614 94.361,86.487
GNDB on GND top "GNDB_L02_P010" (solid, pour order 10): 25.4,76.581 25.4,92.456 111.633,92.456 111.633,28.829 72.263,28.829 72.263,68.707 64.389,76.581
GND on GND top "GND_L02_P008" (solid, pour order 8): 25.4,28.829 70.485,28.829 70.485,68.326 64.008,74.803 25.4,74.803
GNDB on GND bottom "GNDB_L03_P011" (solid, pour order 11): 25.4,76.581 25.4,92.456 111.633,92.456 111.633,28.829 72.263,28.829 72.263,68.707 64.389,76.581
GND on GND bottom "GND_L03_P009" (solid, pour order 9): 25.518,28.829 70.485,28.829 70.485,68.326 64.008,74.803 25.4,74.803
GNDB on Bottom Layer "GNDB_L04_P044" (solid, pour order 44): 101.346,45.72 102.362,46.736 106.299,46.736 107.061,45.974 107.061,38.608 106.045,37.592 105.918,37.719 101.6,37.719 101.346,37.973
GNDB on Bottom Layer "GNDB_L04_P042" (solid, pour order 42): 96.52,45.593 97.155,46.228 99.822,46.228 100.203,45.847 100.203,38.989 99.314,38.1 97.028,38.1 96.52,38.608
GNDB on Bottom Layer "GNDB_L04_P039" (solid, pour order 39): 93.98,64.77 95.123,65.913 97.155,65.913 97.917,65.151 97.917,60.579 96.266,58.928 95.25,58.928 93.98,60.198
GNDB on Bottom Layer "GNDB_L04_P038" (solid, pour order 38): 95.377,87.249 96.52,88.392 104.394,88.392 105.156,87.63 105.156,80.518 104.394,79.756 96.52,79.756 95.377,80.899
GNDB on Bottom Layer "GNDB_L04_P040" (solid, pour order 40): 99.822,65.913 100.838,66.929 104.775,66.929 106.68,65.024 106.68,60.198 104.902,58.42 100.838,58.42 99.822,59.436

## Silkscreen, mask and mechanical layers (free items; w line width, h text height)
Top Overlay: